# EAGLE board SparkFun u-blox GNSS MAX-M10S-Panel (EAGLE 9.6.2), part 1 of 4
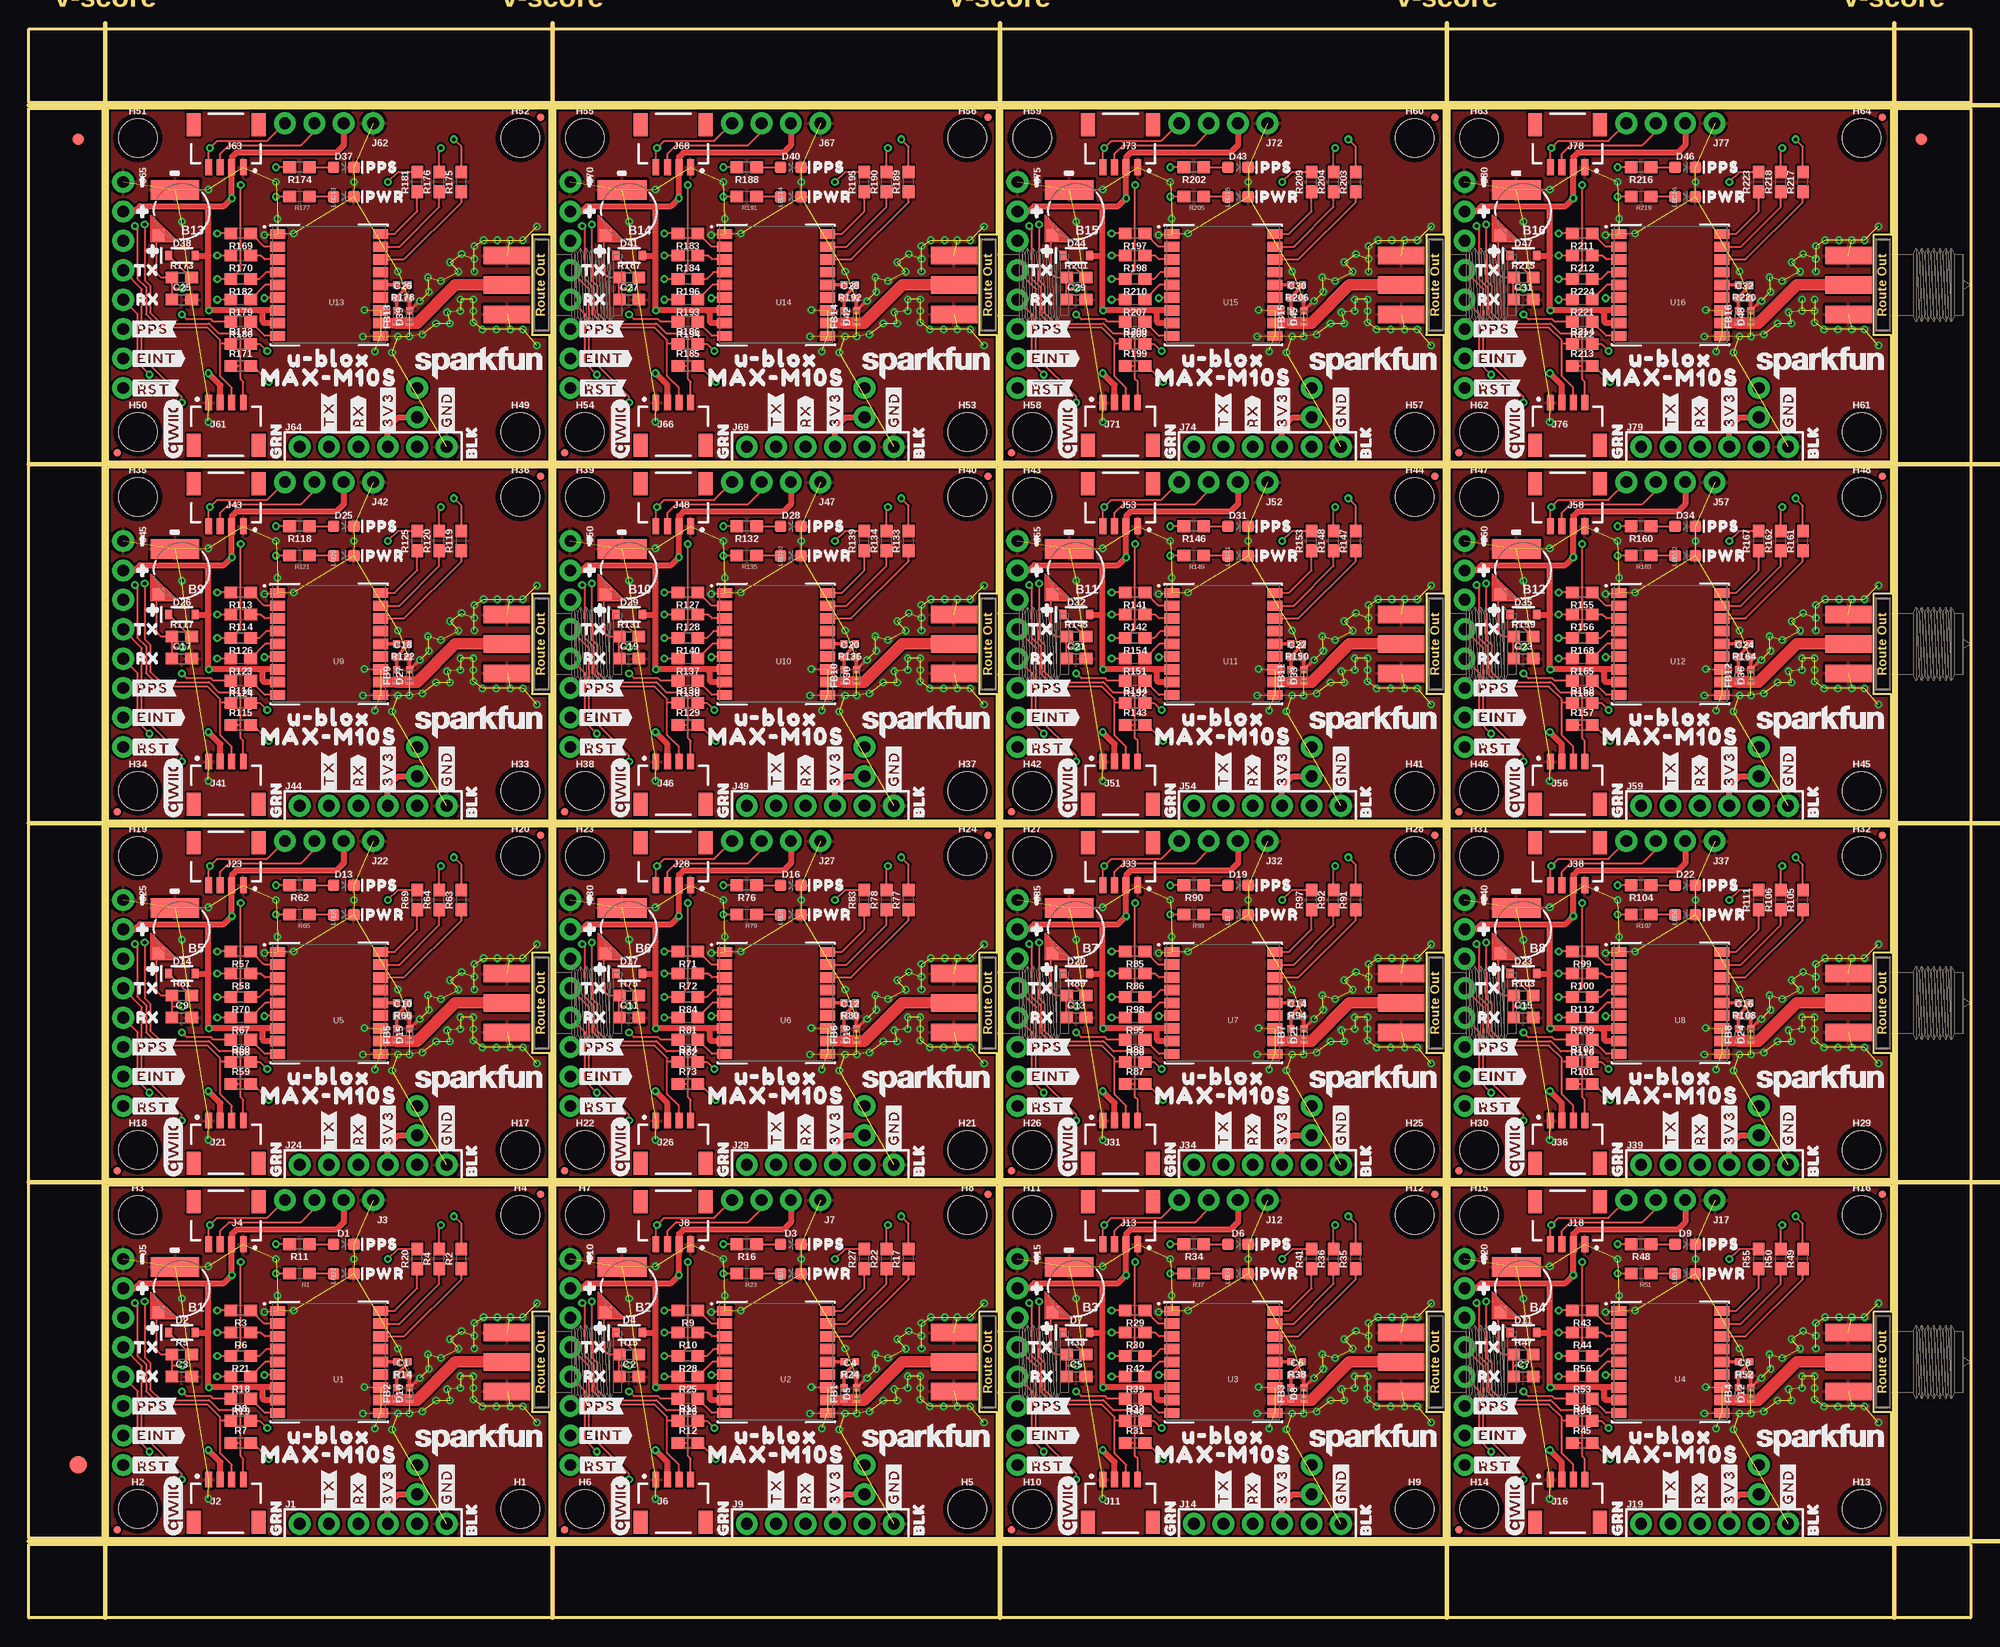
[diagram p0: board, top side]
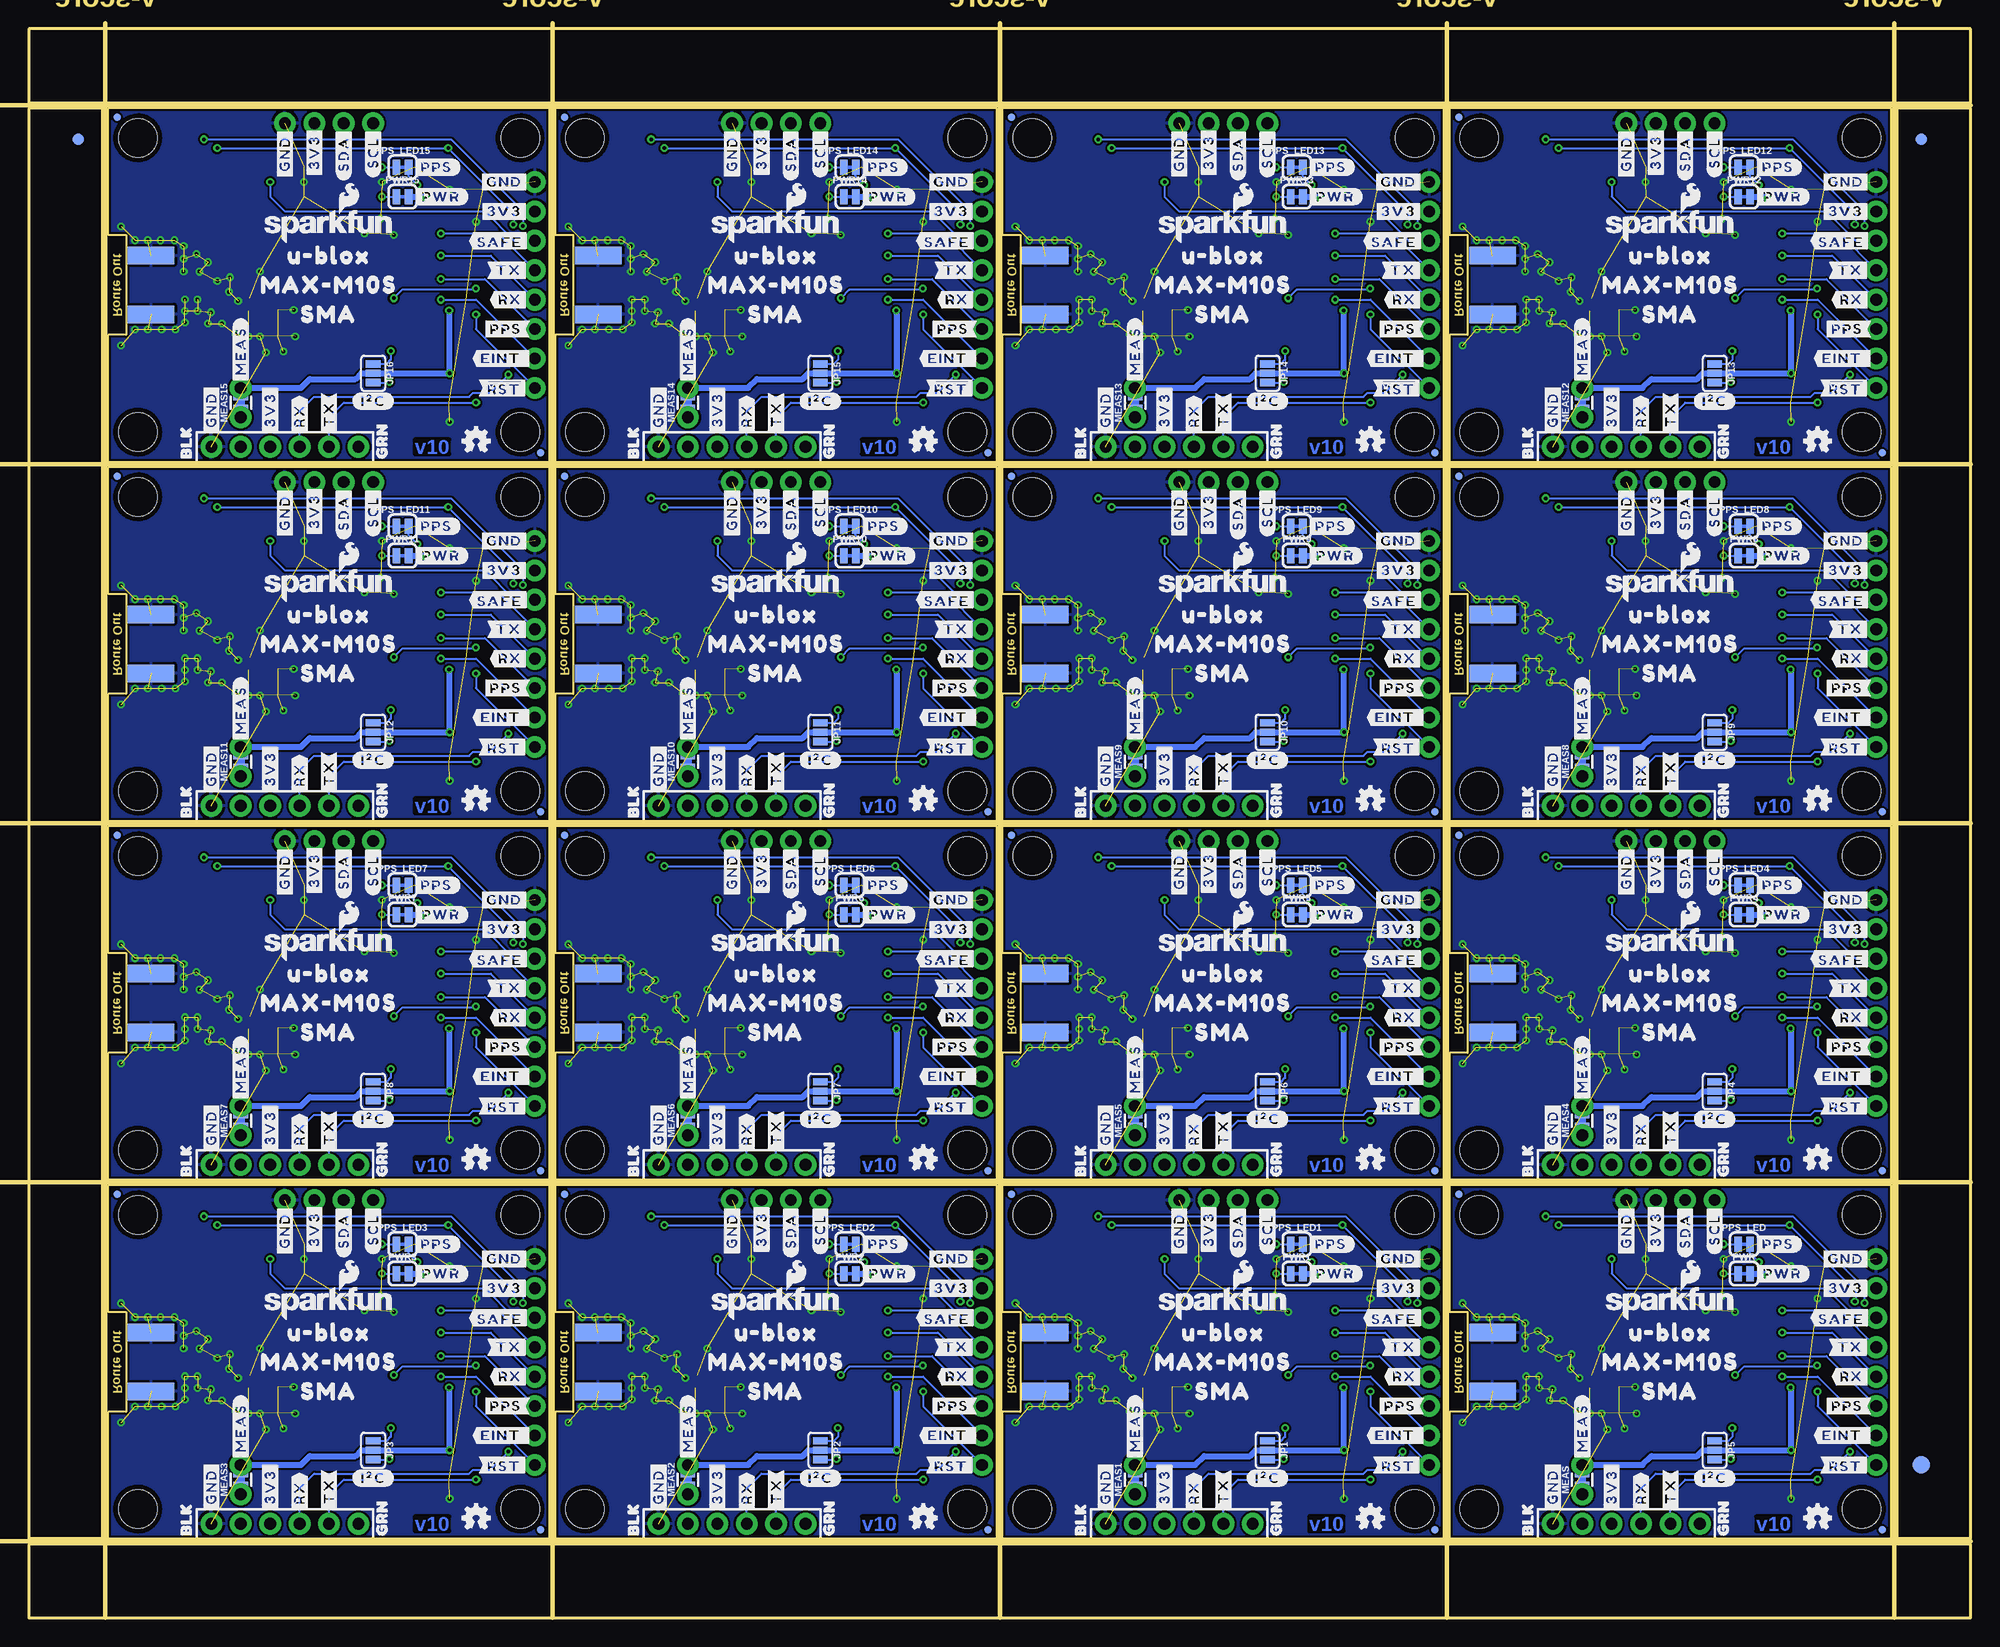
[diagram p1: board, bottom side, seen from below]

Size 167.64 x 137.16 mm. Coordinates in mm from the lower left corner, seen from the top.
Outline: 44.96,6.86 6.86,6.86 6.86,37.34 44.96,37.34 44.96,26.42 43.43,26.42 43.43,17.78 44.96,17.78 44.96,6.86
Outline: 83.57,6.86 45.47,6.86 45.47,37.34 83.57,37.34 83.57,26.42 82.04,26.42 82.04,17.78 83.57,17.78 83.57,6.86
Outline: 122.17,6.86 84.07,6.86 84.07,37.34 122.17,37.34 122.17,26.42 120.65,26.42 120.65,17.78 122.17,17.78 122.17,6.86
Outline: 160.78,6.86 122.68,6.86 122.68,37.34 160.78,37.34 160.78,26.42 159.26,26.42 159.26,17.78 160.78,17.78 160.78,6.86
Outline: 44.96,37.85 6.86,37.85 6.86,68.33 44.96,68.33 44.96,57.4 43.43,57.4 43.43,48.77 44.96,48.77 44.96,37.85
Outline: 83.57,37.85 45.47,37.85 45.47,68.33 83.57,68.33 83.57,57.4 82.04,57.4 82.04,48.77 83.57,48.77 83.57,37.85
Outline: 122.17,37.85 84.07,37.85 84.07,68.33 122.17,68.33 122.17,57.4 120.65,57.4 120.65,48.77 122.17,48.77 122.17,37.85
Outline: 160.78,37.85 122.68,37.85 122.68,68.33 160.78,68.33 160.78,57.4 159.26,57.4 159.26,48.77 160.78,48.77 160.78,37.85
Outline: 44.96,68.83 6.86,68.83 6.86,99.31 44.96,99.31 44.96,88.39 43.43,88.39 43.43,79.76 44.96,79.76 44.96,68.83
Outline: 83.57,68.83 45.47,68.83 45.47,99.31 83.57,99.31 83.57,88.39 82.04,88.39 82.04,79.76 83.57,79.76 83.57,68.83
Outline: 122.17,68.83 84.07,68.83 84.07,99.31 122.17,99.31 122.17,88.39 120.65,88.39 120.65,79.76 122.17,79.76 122.17,68.83
Outline: 160.78,68.83 122.68,68.83 122.68,99.31 160.78,99.31 160.78,88.39 159.26,88.39 159.26,79.76 160.78,79.76 160.78,68.83
Outline: 44.96,99.82 6.86,99.82 6.86,130.3 44.96,130.3 44.96,119.38 43.43,119.38 43.43,110.74 44.96,110.74 44.96,99.82
Outline: 83.57,99.82 45.47,99.82 45.47,130.3 83.57,130.3 83.57,119.38 82.04,119.38 82.04,110.74 83.57,110.74 83.57,99.82
Outline: 122.17,99.82 84.07,99.82 84.07,130.3 122.17,130.3 122.17,119.38 120.65,119.38 120.65,110.74 122.17,110.74 122.17,99.82
Outline: 160.78,99.82 122.68,99.82 122.68,130.3 160.78,130.3 160.78,119.38 159.26,119.38 159.26,110.74 160.78,110.74 160.78,99.82
Outline: 0,6.35 167.64,6.35 167.64,0 0,0 0,6.35
Outline: 161.29,130.3 167.64,130.3 167.64,6.86 161.29,6.86 161.29,130.3
Outline: 0,137.16 167.64,137.16 167.64,130.81 0,130.81 0,137.16
Outline: 0,130.3 6.35,130.3 6.35,6.86 0,6.86 0,130.3
Copper layers (1*16): Top 0.035mm / dielectric 1.5mm / Bottom 0.035mm
Design rules "SparkFun u-blox GNSS MAX-M10S": minimum track width 7mil, minimum drill 0.3mm, track to track 7mil, track to pad 7mil, pad to pad 7mil, via to via 7mil, smd to smd 7mil, copper to edge 7mil, drill to drill 7mil, minimum pad ring 7mil, minimum via ring 7mil, stop-mask expansion 4mil, vias tented up to drill 25mil, thermal gap 10mil
Net classes: 2 3.3V: width 0.508 mm, drill 0.305 mm; 3 RF: width 0.889 mm, drill 0.305 mm, clearance 0.203 mm
tKeepout: area 22.2,17 to 29.6,27.2; area 60.8,17 to 68.2,27.2; area 99.4,17 to 106.8,27.2; area 138,17 to 145.4,27.2; area 22.2,48 to 29.6,58.2; area 60.8,48 to 68.2,58.2; area 99.4,48 to 106.8,58.2; area 138,48 to 145.4,58.2; area 22.2,79 to 29.6,89.2; area 60.8,79 to 68.2,89.2; area 99.4,79 to 106.8,89.2; area 138,79 to 145.4,89.2; area 22.2,110 to 29.6,120.1; area 60.8,110 to 68.2,120.1; area 99.4,110 to 106.8,120.1; area 138,110 to 145.4,120.1
bKeepout: area 22.2,17 to 29.6,27.2; area 60.8,17 to 68.2,27.2; area 99.4,17 to 106.8,27.2; area 138,17 to 145.4,27.2; area 22.2,48 to 29.6,58.2; area 60.8,48 to 68.2,58.2; area 99.4,48 to 106.8,58.2; area 138,48 to 145.4,58.2; area 22.2,79 to 29.6,89.2; area 60.8,79 to 68.2,89.2; area 99.4,79 to 106.8,89.2; area 138,79 to 145.4,89.2; area 22.2,110 to 29.6,120.1; area 60.8,110 to 68.2,120.1; area 99.4,110 to 106.8,120.1; area 138,110 to 145.4,120.1
Milling: 10 lines

## Footprints (pad centres in the part's own frame; a part is rotated, then mirrored left to right if it is on the bottom)
ML414H_IV01E = smd 1 x 1: + 2.022,2.032 | smd 4.2 x 1.7: - 0.6,-1.85
0402-TIGHT = smd 0.6 x 0.6: 1 -0.5,0; 2 0.5,0
0603 = smd 1.1 x 1: 1 -0.85,0; 2 0.85,0
LED-0603 = smd 1 x 1: A -0.877,0; C 0.877,0
SOD-323 = smd 0.63 x 0.83: A 1.15,0; C -1.15,0
SMA-EDGE = smd 1.5 x 4: GND@0 -2.54,0; GND@1 2.54,0; SIG 0,0 | smd 1.5 x 4 bottom: GND@2 -2.54,0; GND@3 2.54,0
FIDUCIAL-1X2 = smd 1 x 1: 1 0,0
FIDUCIAL-1.5X3 = smd 1.5 x 1.5: 1 0,0
FIDUCIAL-MICRO = smd 0.635 x 0.635: 1 0,0
STAND-OFF = hole 3.302: 0,0
1X06_NO_SILK = drill 1.016 pad 1.88: 1 0,0; 2 2.54,0; 3 5.08,0; 4 7.62,0; 5 10.16,0; 6 12.7,0
JST04_1MM_RA = smd 0.6 x 1.35: 1 -1.5,0; 2 -0.5,0; 3 0.5,0; 4 1.5,0 | smd 1.2 x 2: NC1 2.8,-3.675; NC2 -2.8,-3.675
1X04_NO_SILK = drill 1.016 pad 1.88: 1 0,0; 2 2.54,0; 3 5.08,0; 4 7.62,0
1X08_NO_SILK = drill 1.016 pad 1.88: 1 0,0; 2 2.54,0; 3 5.08,0; 4 7.62,0; 5 10.16,0; 6 12.7,0; 7 15.24,0; 8 17.78,0
SMT-JUMPER_3_NO_SILK = smd 0.635 x 1.27: 1 -0.813,0; 2 0,0; 3 0.813,0
COMBO-JUMPER_2_NC_TRACE = smd 0.635 x 1.27: 1 -0.508,0; 2 0.508,0 | drill 1.016 pad 1.88: 3 -1.27,0; 4 1.27,0
SMT-JUMPER_2_NC_TRACE_SILK = smd 0.66 x 1.27: 1 -0.521,0; 2 0.521,0
MAX-M10S = smd 1.3 x 0.8: 1 4.45,-4.4; 9 4.45,4.4; 10 -4.45,4.4; 18 -4.45,-4.4 | smd 1.3 x 0.9: 2 4.45,-3.3; 3 4.45,-2.2; 4 4.45,-1.1; 5 4.45,0; 6 4.45,1.1; 7 4.45,2.2; 8 4.45,3.3; 11 -4.45,3.3; 12 -4.45,2.2; 13 -4.45,1.1; 14 -4.45,0; 15 -4.45,-1.1; 16 -4.45,-2.2; 17 -4.45,-3.3

## Placement (x,y rotation side)
B1  6.8MM_COIN_CELL  [ML414H_IV01E]  13.21,28.45 180 top
B2  6.8MM_COIN_CELL  [ML414H_IV01E]  51.82,28.45 180 top
B3  6.8MM_COIN_CELL  [ML414H_IV01E]  90.42,28.45 180 top
B4  6.8MM_COIN_CELL  [ML414H_IV01E]  129.03,28.45 180 top
B5  6.8MM_COIN_CELL  [ML414H_IV01E]  13.21,59.44 180 top
B6  6.8MM_COIN_CELL  [ML414H_IV01E]  51.82,59.44 180 top
B7  6.8MM_COIN_CELL  [ML414H_IV01E]  90.42,59.44 180 top
B8  6.8MM_COIN_CELL  [ML414H_IV01E]  129.03,59.44 180 top
B9  6.8MM_COIN_CELL  [ML414H_IV01E]  13.21,90.42 180 top
B10  6.8MM_COIN_CELL  [ML414H_IV01E]  51.82,90.42 180 top
B11  6.8MM_COIN_CELL  [ML414H_IV01E]  90.42,90.42 180 top
B12  6.8MM_COIN_CELL  [ML414H_IV01E]  129.03,90.42 180 top
B13  6.8MM_COIN_CELL  [ML414H_IV01E]  13.21,121.41 180 top
B14  6.8MM_COIN_CELL  [ML414H_IV01E]  51.82,121.41 180 top
B15  6.8MM_COIN_CELL  [ML414H_IV01E]  90.42,121.41 180 top
B16  6.8MM_COIN_CELL  [ML414H_IV01E]  129.03,121.41 180 top
C1  47pF  [0402-TIGHT]  32.26,20.95 0 top
C2  1.0uF  [0603]  51.82,20.83 0 top
C3  1.0uF  [0603]  13.21,20.83 0 top
C4  47pF  [0402-TIGHT]  70.87,20.95 0 top
C5  1.0uF  [0603]  90.42,20.83 0 top
C6  47pF  [0402-TIGHT]  109.47,20.95 0 top
C7  1.0uF  [0603]  129.03,20.83 0 top
C8  47pF  [0402-TIGHT]  148.08,20.95 0 top
C9  1.0uF  [0603]  13.21,51.82 0 top
C10  47pF  [0402-TIGHT]  32.26,51.94 0 top
C11  1.0uF  [0603]  51.82,51.82 0 top
C12  47pF  [0402-TIGHT]  70.87,51.94 0 top
C13  1.0uF  [0603]  90.42,51.82 0 top
C14  47pF  [0402-TIGHT]  109.47,51.94 0 top
C15  1.0uF  [0603]  129.03,51.82 0 top
C16  47pF  [0402-TIGHT]  148.08,51.94 0 top
C17  1.0uF  [0603]  13.21,82.8 0 top
C18  47pF  [0402-TIGHT]  32.26,82.93 0 top
C19  1.0uF  [0603]  51.82,82.8 0 top
C20  47pF  [0402-TIGHT]  70.87,82.93 0 top
C21  1.0uF  [0603]  90.42,82.8 0 top
C22  47pF  [0402-TIGHT]  109.47,82.93 0 top
C23  1.0uF  [0603]  129.03,82.8 0 top
C24  47pF  [0402-TIGHT]  148.08,82.93 0 top
C25  1.0uF  [0603]  13.21,113.79 0 top
C26  47pF  [0402-TIGHT]  32.26,113.92 0 top
C27  1.0uF  [0603]  51.82,113.79 0 top
C28  47pF  [0402-TIGHT]  70.87,113.92 0 top
C29  1.0uF  [0603]  90.42,113.79 0 top
C30  47pF  [0402-TIGHT]  109.47,113.92 0 top
C31  1.0uF  [0603]  129.03,113.79 0 top
C32  47pF  [0402-TIGHT]  148.08,113.92 0 top
D1  Yellow  [LED-0603]  27.18,32.26 0 top
D2  0.5A/40V/420mV  [SOD-323]  13.21,24.64 0 top
D3  Yellow  [LED-0603]  65.79,32.26 0 top
D4  0.5A/40V/420mV  [SOD-323]  51.82,24.64 0 top
D5  PESD0402-0402T  [0402-TIGHT]  71.47,19.36 90 top
D6  Yellow  [LED-0603]  104.39,32.26 0 top
D7  0.5A/40V/420mV  [SOD-323]  90.42,24.64 0 top
D8  PESD0402-0402T  [0402-TIGHT]  110.07,19.36 90 top
D9  Yellow  [LED-0603]  143,32.26 0 top
D10  PESD0402-0402T  [0402-TIGHT]  32.86,19.36 90 top
D11  0.5A/40V/420mV  [SOD-323]  129.03,24.64 0 top
D12  PESD0402-0402T  [0402-TIGHT]  148.68,19.36 90 top
D13  Yellow  [LED-0603]  27.18,63.25 0 top
D14  0.5A/40V/420mV  [SOD-323]  13.21,55.63 0 top
D15  PESD0402-0402T  [0402-TIGHT]  32.86,50.35 90 top
D16  Yellow  [LED-0603]  65.79,63.25 0 top
D17  0.5A/40V/420mV  [SOD-323]  51.82,55.63 0 top
D18  PESD0402-0402T  [0402-TIGHT]  71.47,50.35 90 top
D19  Yellow  [LED-0603]  104.39,63.25 0 top
D20  0.5A/40V/420mV  [SOD-323]  90.42,55.63 0 top
D21  PESD0402-0402T  [0402-TIGHT]  110.07,50.35 90 top
D22  Yellow  [LED-0603]  143,63.25 0 top
D23  0.5A/40V/420mV  [SOD-323]  129.03,55.63 0 top
D24  PESD0402-0402T  [0402-TIGHT]  148.68,50.35 90 top
D25  Yellow  [LED-0603]  27.18,94.23 0 top
D26  0.5A/40V/420mV  [SOD-323]  13.21,86.61 0 top
D27  PESD0402-0402T  [0402-TIGHT]  32.86,81.33 90 top
D28  Yellow  [LED-0603]  65.79,94.23 0 top
D29  0.5A/40V/420mV  [SOD-323]  51.82,86.61 0 top
D30  PESD0402-0402T  [0402-TIGHT]  71.47,81.33 90 top
D31  Yellow  [LED-0603]  104.39,94.23 0 top
D32  0.5A/40V/420mV  [SOD-323]  90.42,86.61 0 top
D33  PESD0402-0402T  [0402-TIGHT]  110.07,81.33 90 top
D34  Yellow  [LED-0603]  143,94.23 0 top
D35  0.5A/40V/420mV  [SOD-323]  129.03,86.61 0 top
D36  PESD0402-0402T  [0402-TIGHT]  148.68,81.33 90 top
D37  Yellow  [LED-0603]  27.18,125.22 0 top
D38  0.5A/40V/420mV  [SOD-323]  13.21,117.6 0 top
D39  PESD0402-0402T  [0402-TIGHT]  32.86,112.32 90 top
D40  Yellow  [LED-0603]  65.79,125.22 0 top
D41  0.5A/40V/420mV  [SOD-323]  51.82,117.6 0 top
D42  PESD0402-0402T  [0402-TIGHT]  71.47,112.32 90 top
D43  Yellow  [LED-0603]  104.39,125.22 0 top
D44  0.5A/40V/420mV  [SOD-323]  90.42,117.6 0 top
D45  PESD0402-0402T  [0402-TIGHT]  110.07,112.32 90 top
D46  Yellow  [LED-0603]  143,125.22 0 top
D47  0.5A/40V/420mV  [SOD-323]  129.03,117.6 0 top
D48  PESD0402-0402T  [0402-TIGHT]  148.68,112.32 90 top
E1  ANTENNA-SMA-GROUNDEDEDGE_SMA  [SMA-EDGE]  41.27,22.1 270 top
E2  ANTENNA-SMA-GROUNDEDEDGE_SMA  [SMA-EDGE]  79.88,22.1 270 top
E3  ANTENNA-SMA-GROUNDEDEDGE_SMA  [SMA-EDGE]  118.49,22.1 270 top
E4  ANTENNA-SMA-GROUNDEDEDGE_SMA  [SMA-EDGE]  157.1,22.1 270 top
E5  ANTENNA-SMA-GROUNDEDEDGE_SMA  [SMA-EDGE]  41.27,53.09 270 top
E6  ANTENNA-SMA-GROUNDEDEDGE_SMA  [SMA-EDGE]  79.88,53.09 270 top
E7  ANTENNA-SMA-GROUNDEDEDGE_SMA  [SMA-EDGE]  118.49,53.09 270 top
E8  ANTENNA-SMA-GROUNDEDEDGE_SMA  [SMA-EDGE]  157.1,53.09 270 top
E9  ANTENNA-SMA-GROUNDEDEDGE_SMA  [SMA-EDGE]  41.27,84.07 270 top
E10  ANTENNA-SMA-GROUNDEDEDGE_SMA  [SMA-EDGE]  79.88,84.07 270 top
E11  ANTENNA-SMA-GROUNDEDEDGE_SMA  [SMA-EDGE]  118.49,84.07 270 top
E12  ANTENNA-SMA-GROUNDEDEDGE_SMA  [SMA-EDGE]  157.1,84.07 270 top
E13  ANTENNA-SMA-GROUNDEDEDGE_SMA  [SMA-EDGE]  41.27,115.06 270 top
E14  ANTENNA-SMA-GROUNDEDEDGE_SMA  [SMA-EDGE]  79.88,115.06 270 top
E15  ANTENNA-SMA-GROUNDEDEDGE_SMA  [SMA-EDGE]  118.49,115.06 270 top
E16  ANTENNA-SMA-GROUNDEDEDGE_SMA  [SMA-EDGE]  157.1,115.06 270 top
E$1  [FIDUCIAL-1X2]  4.23,127.64 0 top
E$2  [FIDUCIAL-1X2]  4.23,127.64 0 bottom
E$3  [FIDUCIAL-1X2]  163.41,127.64 0 top
E$4  [FIDUCIAL-1X2]  163.41,127.64 0 bottom
E$5  [FIDUCIAL-1.5X3]  4.23,13.21 0 top
E$6  [FIDUCIAL-1.5X3]  4.23,13.21 0 bottom
FB1  2.66Ω  [0402-TIGHT]  70.37,19.36 90 top
FB2  2.66Ω  [0402-TIGHT]  31.76,19.36 90 top
FB3  2.66Ω  [0402-TIGHT]  108.97,19.36 90 top
FB4  2.66Ω  [0402-TIGHT]  147.58,19.36 90 top
FB5  2.66Ω  [0402-TIGHT]  31.76,50.35 90 top
FB6  2.66Ω  [0402-TIGHT]  70.37,50.35 90 top
FB7  2.66Ω  [0402-TIGHT]  108.97,50.35 90 top
FB8  2.66Ω  [0402-TIGHT]  147.58,50.35 90 top
FB9  2.66Ω  [0402-TIGHT]  31.76,81.33 90 top
FB10  2.66Ω  [0402-TIGHT]  70.37,81.33 90 top
FB11  2.66Ω  [0402-TIGHT]  108.97,81.33 90 top
FB12  2.66Ω  [0402-TIGHT]  147.58,81.33 90 top
FB13  2.66Ω  [0402-TIGHT]  31.76,112.32 90 top
FB14  2.66Ω  [0402-TIGHT]  70.37,112.32 90 top
FB15  2.66Ω  [0402-TIGHT]  108.97,112.32 90 top
FB16  2.66Ω  [0402-TIGHT]  147.58,112.32 90 top
FD1  FIDUCIALUFIDUCIAL  [FIDUCIAL-MICRO]  7.62,7.62 0 top
FD2  FIDUCIALUFIDUCIAL  [FIDUCIAL-MICRO]  7.62,7.62 0 bottom
FD3  FIDUCIALUFIDUCIAL  [FIDUCIAL-MICRO]  44.2,36.58 0 top
FD4  FIDUCIALUFIDUCIAL  [FIDUCIAL-MICRO]  44.2,36.58 0 bottom
FD5  FIDUCIALUFIDUCIAL  [FIDUCIAL-MICRO]  46.23,7.62 0 top
FD6  FIDUCIALUFIDUCIAL  [FIDUCIAL-MICRO]  46.23,7.62 0 bottom
FD7  FIDUCIALUFIDUCIAL  [FIDUCIAL-MICRO]  82.8,36.58 0 top
FD8  FIDUCIALUFIDUCIAL  [FIDUCIAL-MICRO]  82.8,36.58 0 bottom
FD9  FIDUCIALUFIDUCIAL  [FIDUCIAL-MICRO]  84.84,7.62 0 top
FD10  FIDUCIALUFIDUCIAL  [FIDUCIAL-MICRO]  84.84,7.62 0 bottom
FD11  FIDUCIALUFIDUCIAL  [FIDUCIAL-MICRO]  121.41,36.58 0 top
FD12  FIDUCIALUFIDUCIAL  [FIDUCIAL-MICRO]  121.41,36.58 0 bottom
FD13  FIDUCIALUFIDUCIAL  [FIDUCIAL-MICRO]  123.44,7.62 0 top
FD14  FIDUCIALUFIDUCIAL  [FIDUCIAL-MICRO]  123.44,7.62 0 bottom
FD15  FIDUCIALUFIDUCIAL  [FIDUCIAL-MICRO]  160.02,36.58 0 top
FD16  FIDUCIALUFIDUCIAL  [FIDUCIAL-MICRO]  160.02,36.58 0 bottom
FD17  FIDUCIALUFIDUCIAL  [FIDUCIAL-MICRO]  7.62,38.61 0 top
FD18  FIDUCIALUFIDUCIAL  [FIDUCIAL-MICRO]  7.62,38.61 0 bottom
FD19  FIDUCIALUFIDUCIAL  [FIDUCIAL-MICRO]  44.2,67.56 0 top
FD20  FIDUCIALUFIDUCIAL  [FIDUCIAL-MICRO]  44.2,67.56 0 bottom
FD21  FIDUCIALUFIDUCIAL  [FIDUCIAL-MICRO]  46.23,38.61 0 top
FD22  FIDUCIALUFIDUCIAL  [FIDUCIAL-MICRO]  46.23,38.61 0 bottom
FD23  FIDUCIALUFIDUCIAL  [FIDUCIAL-MICRO]  82.8,67.56 0 top
FD24  FIDUCIALUFIDUCIAL  [FIDUCIAL-MICRO]  82.8,67.56 0 bottom
FD25  FIDUCIALUFIDUCIAL  [FIDUCIAL-MICRO]  84.84,38.61 0 top
FD26  FIDUCIALUFIDUCIAL  [FIDUCIAL-MICRO]  84.84,38.61 0 bottom
FD27  FIDUCIALUFIDUCIAL  [FIDUCIAL-MICRO]  121.41,67.56 0 top
FD28  FIDUCIALUFIDUCIAL  [FIDUCIAL-MICRO]  121.41,67.56 0 bottom
FD29  FIDUCIALUFIDUCIAL  [FIDUCIAL-MICRO]  123.44,38.61 0 top
FD30  FIDUCIALUFIDUCIAL  [FIDUCIAL-MICRO]  123.44,38.61 0 bottom
FD31  FIDUCIALUFIDUCIAL  [FIDUCIAL-MICRO]  160.02,67.56 0 top
FD32  FIDUCIALUFIDUCIAL  [FIDUCIAL-MICRO]  160.02,67.56 0 bottom
FD33  FIDUCIALUFIDUCIAL  [FIDUCIAL-MICRO]  7.62,69.6 0 top
FD34  FIDUCIALUFIDUCIAL  [FIDUCIAL-MICRO]  7.62,69.6 0 bottom
FD35  FIDUCIALUFIDUCIAL  [FIDUCIAL-MICRO]  44.2,98.55 0 top
FD36  FIDUCIALUFIDUCIAL  [FIDUCIAL-MICRO]  44.2,98.55 0 bottom
FD37  FIDUCIALUFIDUCIAL  [FIDUCIAL-MICRO]  46.23,69.6 0 top
FD38  FIDUCIALUFIDUCIAL  [FIDUCIAL-MICRO]  46.23,69.6 0 bottom
FD39  FIDUCIALUFIDUCIAL  [FIDUCIAL-MICRO]  82.8,98.55 0 top
FD40  FIDUCIALUFIDUCIAL  [FIDUCIAL-MICRO]  82.8,98.55 0 bottom
FD41  FIDUCIALUFIDUCIAL  [FIDUCIAL-MICRO]  84.84,69.6 0 top
FD42  FIDUCIALUFIDUCIAL  [FIDUCIAL-MICRO]  84.84,69.6 0 bottom
FD43  FIDUCIALUFIDUCIAL  [FIDUCIAL-MICRO]  121.41,98.55 0 top
FD44  FIDUCIALUFIDUCIAL  [FIDUCIAL-MICRO]  121.41,98.55 0 bottom
FD45  FIDUCIALUFIDUCIAL  [FIDUCIAL-MICRO]  123.44,69.6 0 top
FD46  FIDUCIALUFIDUCIAL  [FIDUCIAL-MICRO]  123.44,69.6 0 bottom
FD47  FIDUCIALUFIDUCIAL  [FIDUCIAL-MICRO]  160.02,98.55 0 top
FD48  FIDUCIALUFIDUCIAL  [FIDUCIAL-MICRO]  160.02,98.55 0 bottom
FD49  FIDUCIALUFIDUCIAL  [FIDUCIAL-MICRO]  7.62,100.58 0 top
FD50  FIDUCIALUFIDUCIAL  [FIDUCIAL-MICRO]  7.62,100.58 0 bottom
FD51  FIDUCIALUFIDUCIAL  [FIDUCIAL-MICRO]  44.2,129.54 0 top
FD52  FIDUCIALUFIDUCIAL  [FIDUCIAL-MICRO]  44.2,129.54 0 bottom
FD53  FIDUCIALUFIDUCIAL  [FIDUCIAL-MICRO]  46.23,100.58 0 top
FD54  FIDUCIALUFIDUCIAL  [FIDUCIAL-MICRO]  46.23,100.58 0 bottom
FD55  FIDUCIALUFIDUCIAL  [FIDUCIAL-MICRO]  82.8,129.54 0 top
FD56  FIDUCIALUFIDUCIAL  [FIDUCIAL-MICRO]  82.8,129.54 0 bottom
FD57  FIDUCIALUFIDUCIAL  [FIDUCIAL-MICRO]  84.84,100.58 0 top
FD58  FIDUCIALUFIDUCIAL  [FIDUCIAL-MICRO]  84.84,100.58 0 bottom
FD59  FIDUCIALUFIDUCIAL  [FIDUCIAL-MICRO]  121.41,129.54 0 top
FD60  FIDUCIALUFIDUCIAL  [FIDUCIAL-MICRO]  121.41,129.54 0 bottom
FD61  FIDUCIALUFIDUCIAL  [FIDUCIAL-MICRO]  123.44,100.58 0 top
FD62  FIDUCIALUFIDUCIAL  [FIDUCIAL-MICRO]  123.44,100.58 0 bottom
FD63  FIDUCIALUFIDUCIAL  [FIDUCIAL-MICRO]  160.02,129.54 0 top
FD64  FIDUCIALUFIDUCIAL  [FIDUCIAL-MICRO]  160.02,129.54 0 bottom
H1  STAND-OFF  [STAND-OFF]  42.42,9.4 0 top
H2  STAND-OFF  [STAND-OFF]  9.4,9.4 0 top
H3  STAND-OFF  [STAND-OFF]  9.4,34.8 0 top
H4  STAND-OFF  [STAND-OFF]  42.42,34.8 0 top
H5  STAND-OFF  [STAND-OFF]  81.03,9.4 0 top
H6  STAND-OFF  [STAND-OFF]  48.01,9.4 0 top
H7  STAND-OFF  [STAND-OFF]  48.01,34.8 0 top
H8  STAND-OFF  [STAND-OFF]  81.03,34.8 0 top
H9  STAND-OFF  [STAND-OFF]  119.63,9.4 0 top
H10  STAND-OFF  [STAND-OFF]  86.61,9.4 0 top
H11  STAND-OFF  [STAND-OFF]  86.61,34.8 0 top
H12  STAND-OFF  [STAND-OFF]  119.63,34.8 0 top
H13  STAND-OFF  [STAND-OFF]  158.24,9.4 0 top
H14  STAND-OFF  [STAND-OFF]  125.22,9.4 0 top
H15  STAND-OFF  [STAND-OFF]  125.22,34.8 0 top
H16  STAND-OFF  [STAND-OFF]  158.24,34.8 0 top
H17  STAND-OFF  [STAND-OFF]  42.42,40.39 0 top
H18  STAND-OFF  [STAND-OFF]  9.4,40.39 0 top
H19  STAND-OFF  [STAND-OFF]  9.4,65.79 0 top
H20  STAND-OFF  [STAND-OFF]  42.42,65.79 0 top
H21  STAND-OFF  [STAND-OFF]  81.03,40.39 0 top
H22  STAND-OFF  [STAND-OFF]  48.01,40.39 0 top
H23  STAND-OFF  [STAND-OFF]  48.01,65.79 0 top
H24  STAND-OFF  [STAND-OFF]  81.03,65.79 0 top
H25  STAND-OFF  [STAND-OFF]  119.63,40.39 0 top
H26  STAND-OFF  [STAND-OFF]  86.61,40.39 0 top
H27  STAND-OFF  [STAND-OFF]  86.61,65.79 0 top
H28  STAND-OFF  [STAND-OFF]  119.63,65.79 0 top
H29  STAND-OFF  [STAND-OFF]  158.24,40.39 0 top
H30  STAND-OFF  [STAND-OFF]  125.22,40.39 0 top
H31  STAND-OFF  [STAND-OFF]  125.22,65.79 0 top
H32  STAND-OFF  [STAND-OFF]  158.24,65.79 0 top
H33  STAND-OFF  [STAND-OFF]  42.42,71.37 0 top
H34  STAND-OFF  [STAND-OFF]  9.4,71.37 0 top
H35  STAND-OFF  [STAND-OFF]  9.4,96.77 0 top
H36  STAND-OFF  [STAND-OFF]  42.42,96.77 0 top
H37  STAND-OFF  [STAND-OFF]  81.03,71.37 0 top
H38  STAND-OFF  [STAND-OFF]  48.01,71.37 0 top
H39  STAND-OFF  [STAND-OFF]  48.01,96.77 0 top
H40  STAND-OFF  [STAND-OFF]  81.03,96.77 0 top
H41  STAND-OFF  [STAND-OFF]  119.63,71.37 0 top
H42  STAND-OFF  [STAND-OFF]  86.61,71.37 0 top
H43  STAND-OFF  [STAND-OFF]  86.61,96.77 0 top
H44  STAND-OFF  [STAND-OFF]  119.63,96.77 0 top
H45  STAND-OFF  [STAND-OFF]  158.24,71.37 0 top
H46  STAND-OFF  [STAND-OFF]  125.22,71.37 0 top
H47  STAND-OFF  [STAND-OFF]  125.22,96.77 0 top
H48  STAND-OFF  [STAND-OFF]  158.24,96.77 0 top
H49  STAND-OFF  [STAND-OFF]  42.42,102.36 0 top
H50  STAND-OFF  [STAND-OFF]  9.4,102.36 0 top
H51  STAND-OFF  [STAND-OFF]  9.4,127.76 0 top
H52  STAND-OFF  [STAND-OFF]  42.42,127.76 0 top
H53  STAND-OFF  [STAND-OFF]  81.03,102.36 0 top
H54  STAND-OFF  [STAND-OFF]  48.01,102.36 0 top
H55  STAND-OFF  [STAND-OFF]  48.01,127.76 0 top
H56  STAND-OFF  [STAND-OFF]  81.03,127.76 0 top
H57  STAND-OFF  [STAND-OFF]  119.63,102.36 0 top
H58  STAND-OFF  [STAND-OFF]  86.61,102.36 0 top
H59  STAND-OFF  [STAND-OFF]  86.61,127.76 0 top
H60  STAND-OFF  [STAND-OFF]  119.63,127.76 0 top
H61  STAND-OFF  [STAND-OFF]  158.24,102.36 0 top
H62  STAND-OFF  [STAND-OFF]  125.22,102.36 0 top
H63  STAND-OFF  [STAND-OFF]  125.22,127.76 0 top
H64  STAND-OFF  [STAND-OFF]  158.24,127.76 0 top
J1  USB-to-Serial  [1X06_NO_SILK]  23.37,8.13 0 top
J2  Qwiic RA  [JST04_1MM_RA]  17.02,11.94 0 top
J3  PTH  [1X04_NO_SILK]  29.72,36.07 180 top
J4  Qwiic RA  [JST04_1MM_RA]  17.02,32.26 180 top
J5  [1X08_NO_SILK]  8.13,30.99 270 top
J6  Qwiic RA  [JST04_1MM_RA]  55.63,11.94 0 top
J7  PTH  [1X04_NO_SILK]  68.33,36.07 180 top
J8  Qwiic RA  [JST04_1MM_RA]  55.63,32.26 180 top
J9  USB-to-Serial  [1X06_NO_SILK]  61.98,8.13 0 top
J10  [1X08_NO_SILK]  46.74,30.99 270 top
J11  Qwiic RA  [JST04_1MM_RA]  94.23,11.94 0 top
J12  PTH  [1X04_NO_SILK]  106.93,36.07 180 top
J13  Qwiic RA  [JST04_1MM_RA]  94.23,32.26 180 top
J14  USB-to-Serial  [1X06_NO_SILK]  100.58,8.13 0 top
J15  [1X08_NO_SILK]  85.34,30.99 270 top
J16  Qwiic RA  [JST04_1MM_RA]  132.84,11.94 0 top
J17  PTH  [1X04_NO_SILK]  145.54,36.07 180 top
J18  Qwiic RA  [JST04_1MM_RA]  132.84,32.26 180 top
J19  USB-to-Serial  [1X06_NO_SILK]  139.19,8.13 0 top
J20  [1X08_NO_SILK]  123.95,30.99 270 top
J21  Qwiic RA  [JST04_1MM_RA]  17.02,42.93 0 top
J22  PTH  [1X04_NO_SILK]  29.72,67.06 180 top
J23  Qwiic RA  [JST04_1MM_RA]  17.02,63.25 180 top
J24  USB-to-Serial  [1X06_NO_SILK]  23.37,39.12 0 top
J25  [1X08_NO_SILK]  8.13,61.98 270 top
J26  Qwiic RA  [JST04_1MM_RA]  55.63,42.93 0 top
J27  PTH  [1X04_NO_SILK]  68.33,67.06 180 top
J28  Qwiic RA  [JST04_1MM_RA]  55.63,63.25 180 top
J29  USB-to-Serial  [1X06_NO_SILK]  61.98,39.12 0 top
J30  [1X08_NO_SILK]  46.74,61.98 270 top
J31  Qwiic RA  [JST04_1MM_RA]  94.23,42.93 0 top
J32  PTH  [1X04_NO_SILK]  106.93,67.06 180 top
J33  Qwiic RA  [JST04_1MM_RA]  94.23,63.25 180 top
J34  USB-to-Serial  [1X06_NO_SILK]  100.58,39.12 0 top
J35  [1X08_NO_SILK]  85.34,61.98 270 top
J36  Qwiic RA  [JST04_1MM_RA]  132.84,42.93 0 top
J37  PTH  [1X04_NO_SILK]  145.54,67.06 180 top
J38  Qwiic RA  [JST04_1MM_RA]  132.84,63.25 180 top
J39  USB-to-Serial  [1X06_NO_SILK]  139.19,39.12 0 top
J40  [1X08_NO_SILK]  123.95,61.98 270 top
J41  Qwiic RA  [JST04_1MM_RA]  17.02,73.91 0 top
J42  PTH  [1X04_NO_SILK]  29.72,98.04 180 top
J43  Qwiic RA  [JST04_1MM_RA]  17.02,94.23 180 top
J44  USB-to-Serial  [1X06_NO_SILK]  23.37,70.1 0 top
J45  [1X08_NO_SILK]  8.13,92.96 270 top
J46  Qwiic RA  [JST04_1MM_RA]  55.63,73.91 0 top
J47  PTH  [1X04_NO_SILK]  68.33,98.04 180 top
J48  Qwiic RA  [JST04_1MM_RA]  55.63,94.23 180 top
J49  USB-to-Serial  [1X06_NO_SILK]  61.98,70.1 0 top
J50  [1X08_NO_SILK]  46.74,92.96 270 top
J51  Qwiic RA  [JST04_1MM_RA]  94.23,73.91 0 top
J52  PTH  [1X04_NO_SILK]  106.93,98.04 180 top
J53  Qwiic RA  [JST04_1MM_RA]  94.23,94.23 180 top
J54  USB-to-Serial  [1X06_NO_SILK]  100.58,70.1 0 top
J55  [1X08_NO_SILK]  85.34,92.96 270 top
J56  Qwiic RA  [JST04_1MM_RA]  132.84,73.91 0 top
J57  PTH  [1X04_NO_SILK]  145.54,98.04 180 top
J58  Qwiic RA  [JST04_1MM_RA]  132.84,94.23 180 top
J59  USB-to-Serial  [1X06_NO_SILK]  139.19,70.1 0 top
J60  [1X08_NO_SILK]  123.95,92.96 270 top
J61  Qwiic RA  [JST04_1MM_RA]  17.02,104.9 0 top
J62  PTH  [1X04_NO_SILK]  29.72,129.03 180 top
J63  Qwiic RA  [JST04_1MM_RA]  17.02,125.22 180 top
J64  USB-to-Serial  [1X06_NO_SILK]  23.37,101.09 0 top
J65  [1X08_NO_SILK]  8.13,123.95 270 top
J66  Qwiic RA  [JST04_1MM_RA]  55.63,104.9 0 top
J67  PTH  [1X04_NO_SILK]  68.33,129.03 180 top
J68  Qwiic RA  [JST04_1MM_RA]  55.63,125.22 180 top
J69  USB-to-Serial  [1X06_NO_SILK]  61.98,101.09 0 top
J70  [1X08_NO_SILK]  46.74,123.95 270 top
J71  Qwiic RA  [JST04_1MM_RA]  94.23,104.9 0 top
J72  PTH  [1X04_NO_SILK]  106.93,129.03 180 top
J73  Qwiic RA  [JST04_1MM_RA]  94.23,125.22 180 top
J74  USB-to-Serial  [1X06_NO_SILK]  100.58,101.09 0 top
J75  [1X08_NO_SILK]  85.34,123.95 270 top
J76  Qwiic RA  [JST04_1MM_RA]  132.84,104.9 0 top
J77  PTH  [1X04_NO_SILK]  145.54,129.03 180 top
J78  Qwiic RA  [JST04_1MM_RA]  132.84,125.22 180 top
J79  USB-to-Serial  [1X06_NO_SILK]  139.19,101.09 0 top
J80  [1X08_NO_SILK]  123.95,123.95 270 top
JP1  JUMPER-SMT_3_NO_SILK  [SMT-JUMPER_3_NO_SILK]  60.71,14.48 270 bottom
JP2  JUMPER-SMT_3_NO_SILK  [SMT-JUMPER_3_NO_SILK]  99.31,14.48 270 bottom
JP3  JUMPER-SMT_3_NO_SILK  [SMT-JUMPER_3_NO_SILK]  137.92,14.48 270 bottom
JP4  JUMPER-SMT_3_NO_SILK  [SMT-JUMPER_3_NO_SILK]  22.1,45.47 270 bottom
JP5  JUMPER-SMT_3_NO_SILK  [SMT-JUMPER_3_NO_SILK]  22.1,14.48 270 bottom
JP6  JUMPER-SMT_3_NO_SILK  [SMT-JUMPER_3_NO_SILK]  60.71,45.47 270 bottom
JP7  JUMPER-SMT_3_NO_SILK  [SMT-JUMPER_3_NO_SILK]  99.31,45.47 270 bottom
JP8  JUMPER-SMT_3_NO_SILK  [SMT-JUMPER_3_NO_SILK]  137.92,45.47 270 bottom
JP9  JUMPER-SMT_3_NO_SILK  [SMT-JUMPER_3_NO_SILK]  22.1,76.45 270 bottom
JP10  JUMPER-SMT_3_NO_SILK  [SMT-JUMPER_3_NO_SILK]  60.71,76.45 270 bottom
JP11  JUMPER-SMT_3_NO_SILK  [SMT-JUMPER_3_NO_SILK]  99.31,76.45 270 bottom
JP12  JUMPER-SMT_3_NO_SILK  [SMT-JUMPER_3_NO_SILK]  137.92,76.45 270 bottom
JP13  JUMPER-SMT_3_NO_SILK  [SMT-JUMPER_3_NO_SILK]  22.1,107.44 270 bottom
JP14  JUMPER-SMT_3_NO_SILK  [SMT-JUMPER_3_NO_SILK]  60.71,107.44 270 bottom
JP15  JUMPER-SMT_3_NO_SILK  [SMT-JUMPER_3_NO_SILK]  99.31,107.44 270 bottom
JP16  JUMPER-SMT_3_NO_SILK  [SMT-JUMPER_3_NO_SILK]  137.92,107.44 270 bottom
LED1  RED  [LED-0603]  65.79,29.72 0 top
LED2  RED  [LED-0603]  27.18,29.72 0 top
LED3  RED  [LED-0603]  104.39,29.72 0 top
LED4  RED  [LED-0603]  143,29.72 0 top
LED5  RED  [LED-0603]  27.18,60.71 0 top
LED6  RED  [LED-0603]  65.79,60.71 0 top
LED7  RED  [LED-0603]  104.39,60.71 0 top
LED8  RED  [LED-0603]  143,60.71 0 top
LED9  RED  [LED-0603]  27.18,91.69 0 top
LED10  RED  [LED-0603]  65.79,91.69 0 top
LED11  RED  [LED-0603]  104.39,91.69 0 top
LED12  RED  [LED-0603]  143,91.69 0 top
LED13  RED  [LED-0603]  27.18,122.68 0 top
LED14  RED  [LED-0603]  65.79,122.68 0 top
LED15  RED  [LED-0603]  104.39,122.68 0 top
LED16  RED  [LED-0603]  143,122.68 0 top
LOGO1  OSHW-LOGOMINI  [OSHW-LOGO-MINI]  13.21,8.64 0 bottom
LOGO2  SFE_LOGO_NAME_FLAME.1_INCH  [SFE_LOGO_NAME_FLAME_.1]  25.91,27.18 0 bottom
LOGO3  QWIIC_LOGO_5MM  [QWIIC_5MM]  12.45,9.65 90 top
LOGO4  SFE_LOGO_NAME.1_INCH  [SFE_LOGO_NAME_.1]  38.86,15.36 0 top
LOGO5  OSHW-LOGOMINI  [OSHW-LOGO-MINI]  51.82,8.64 0 bottom
LOGO6  SFE_LOGO_NAME_FLAME.1_INCH  [SFE_LOGO_NAME_FLAME_.1]  64.52,27.18 0 bottom
LOGO7  QWIIC_LOGO_5MM  [QWIIC_5MM]  51.05,9.65 90 top
LOGO8  SFE_LOGO_NAME.1_INCH  [SFE_LOGO_NAME_.1]  77.47,15.36 0 top
LOGO9  OSHW-LOGOMINI  [OSHW-LOGO-MINI]  90.42,8.64 0 bottom
LOGO10  SFE_LOGO_NAME_FLAME.1_INCH  [SFE_LOGO_NAME_FLAME_.1]  103.12,27.18 0 bottom
LOGO11  QWIIC_LOGO_5MM  [QWIIC_5MM]  89.66,9.65 90 top
LOGO12  SFE_LOGO_NAME.1_INCH  [SFE_LOGO_NAME_.1]  116.07,15.36 0 top
LOGO13  OSHW-LOGOMINI  [OSHW-LOGO-MINI]  129.03,8.64 0 bottom
LOGO14  SFE_LOGO_NAME_FLAME.1_INCH  [SFE_LOGO_NAME_FLAME_.1]  141.73,27.18 0 bottom
LOGO15  QWIIC_LOGO_5MM  [QWIIC_5MM]  128.27,9.65 90 top
LOGO16  SFE_LOGO_NAME.1_INCH  [SFE_LOGO_NAME_.1]  154.68,15.36 0 top
LOGO17  OSHW-LOGOMINI  [OSHW-LOGO-MINI]  13.21,39.62 0 bottom
LOGO18  SFE_LOGO_NAME_FLAME.1_INCH  [SFE_LOGO_NAME_FLAME_.1]  25.91,58.17 0 bottom
LOGO19  QWIIC_LOGO_5MM  [QWIIC_5MM]  12.45,40.64 90 top
LOGO20  SFE_LOGO_NAME.1_INCH  [SFE_LOGO_NAME_.1]  38.86,46.35 0 top
LOGO21  OSHW-LOGOMINI  [OSHW-LOGO-MINI]  51.82,39.62 0 bottom
LOGO22  SFE_LOGO_NAME_FLAME.1_INCH  [SFE_LOGO_NAME_FLAME_.1]  64.52,58.17 0 bottom
LOGO23  QWIIC_LOGO_5MM  [QWIIC_5MM]  51.05,40.64 90 top
LOGO24  SFE_LOGO_NAME.1_INCH  [SFE_LOGO_NAME_.1]  77.47,46.35 0 top
LOGO25  OSHW-LOGOMINI  [OSHW-LOGO-MINI]  90.42,39.62 0 bottom
LOGO26  SFE_LOGO_NAME_FLAME.1_INCH  [SFE_LOGO_NAME_FLAME_.1]  103.12,58.17 0 bottom
LOGO27  QWIIC_LOGO_5MM  [QWIIC_5MM]  89.66,40.64 90 top
LOGO28  SFE_LOGO_NAME.1_INCH  [SFE_LOGO_NAME_.1]  116.07,46.35 0 top
LOGO29  OSHW-LOGOMINI  [OSHW-LOGO-MINI]  129.03,39.62 0 bottom
LOGO30  SFE_LOGO_NAME_FLAME.1_INCH  [SFE_LOGO_NAME_FLAME_.1]  141.73,58.17 0 bottom
LOGO31  QWIIC_LOGO_5MM  [QWIIC_5MM]  128.27,40.64 90 top
LOGO32  SFE_LOGO_NAME.1_INCH  [SFE_LOGO_NAME_.1]  154.68,46.35 0 top
LOGO33  OSHW-LOGOMINI  [OSHW-LOGO-MINI]  13.21,70.61 0 bottom
LOGO34  SFE_LOGO_NAME_FLAME.1_INCH  [SFE_LOGO_NAME_FLAME_.1]  25.91,89.15 0 bottom
LOGO35  QWIIC_LOGO_5MM  [QWIIC_5MM]  12.45,71.63 90 top
LOGO36  SFE_LOGO_NAME.1_INCH  [SFE_LOGO_NAME_.1]  38.86,77.33 0 top
LOGO37  OSHW-LOGOMINI  [OSHW-LOGO-MINI]  51.82,70.61 0 bottom
LOGO38  SFE_LOGO_NAME_FLAME.1_INCH  [SFE_LOGO_NAME_FLAME_.1]  64.52,89.15 0 bottom
LOGO39  QWIIC_LOGO_5MM  [QWIIC_5MM]  51.05,71.63 90 top
LOGO40  SFE_LOGO_NAME.1_INCH  [SFE_LOGO_NAME_.1]  77.47,77.33 0 top
LOGO41  OSHW-LOGOMINI  [OSHW-LOGO-MINI]  90.42,70.61 0 bottom
LOGO42  SFE_LOGO_NAME_FLAME.1_INCH  [SFE_LOGO_NAME_FLAME_.1]  103.12,89.15 0 bottom
LOGO43  QWIIC_LOGO_5MM  [QWIIC_5MM]  89.66,71.63 90 top
LOGO44  SFE_LOGO_NAME.1_INCH  [SFE_LOGO_NAME_.1]  116.07,77.33 0 top
LOGO45  OSHW-LOGOMINI  [OSHW-LOGO-MINI]  129.03,70.61 0 bottom
LOGO46  SFE_LOGO_NAME_FLAME.1_INCH  [SFE_LOGO_NAME_FLAME_.1]  141.73,89.15 0 bottom
LOGO47  QWIIC_LOGO_5MM  [QWIIC_5MM]  128.27,71.63 90 top
LOGO48  SFE_LOGO_NAME.1_INCH  [SFE_LOGO_NAME_.1]  154.68,77.33 0 top
LOGO49  OSHW-LOGOMINI  [OSHW-LOGO-MINI]  13.21,101.6 0 bottom
LOGO50  SFE_LOGO_NAME_FLAME.1_INCH  [SFE_LOGO_NAME_FLAME_.1]  25.91,120.14 0 bottom
LOGO51  QWIIC_LOGO_5MM  [QWIIC_5MM]  12.45,102.62 90 top
LOGO52  SFE_LOGO_NAME.1_INCH  [SFE_LOGO_NAME_.1]  38.86,108.32 0 top
LOGO53  OSHW-LOGOMINI  [OSHW-LOGO-MINI]  51.82,101.6 0 bottom
LOGO54  SFE_LOGO_NAME_FLAME.1_INCH  [SFE_LOGO_NAME_FLAME_.1]  64.52,120.14 0 bottom
LOGO55  QWIIC_LOGO_5MM  [QWIIC_5MM]  51.05,102.62 90 top
LOGO56  SFE_LOGO_NAME.1_INCH  [SFE_LOGO_NAME_.1]  77.47,108.32 0 top
LOGO57  OSHW-LOGOMINI  [OSHW-LOGO-MINI]  90.42,101.6 0 bottom
LOGO58  SFE_LOGO_NAME_FLAME.1_INCH  [SFE_LOGO_NAME_FLAME_.1]  103.12,120.14 0 bottom
LOGO59  QWIIC_LOGO_5MM  [QWIIC_5MM]  89.66,102.62 90 top
LOGO60  SFE_LOGO_NAME.1_INCH  [SFE_LOGO_NAME_.1]  116.07,108.32 0 top
LOGO61  OSHW-LOGOMINI  [OSHW-LOGO-MINI]  129.03,101.6 0 bottom
LOGO62  SFE_LOGO_NAME_FLAME.1_INCH  [SFE_LOGO_NAME_FLAME_.1]  141.73,120.14 0 bottom
LOGO63  QWIIC_LOGO_5MM  [QWIIC_5MM]  128.27,102.62 90 top
LOGO64  SFE_LOGO_NAME.1_INCH  [SFE_LOGO_NAME_.1]  154.68,108.32 0 top
MEAS  JUMPER-COMBO_2_NC_TRACE  [COMBO-JUMPER_2_NC_TRACE]  33.53,11.94 90 bottom
MEAS1  JUMPER-COMBO_2_NC_TRACE  [COMBO-JUMPER_2_NC_TRACE]  72.14,11.94 90 bottom
MEAS2  JUMPER-COMBO_2_NC_TRACE  [COMBO-JUMPER_2_NC_TRACE]  110.74,11.94 90 bottom
MEAS3  JUMPER-COMBO_2_NC_TRACE  [COMBO-JUMPER_2_NC_TRACE]  149.35,11.94 90 bottom
MEAS4  JUMPER-COMBO_2_NC_TRACE  [COMBO-JUMPER_2_NC_TRACE]  33.53,42.93 90 bottom
MEAS5  JUMPER-COMBO_2_NC_TRACE  [COMBO-JUMPER_2_NC_TRACE]  72.14,42.93 90 bottom
MEAS6  JUMPER-COMBO_2_NC_TRACE  [COMBO-JUMPER_2_NC_TRACE]  110.74,42.93 90 bottom
MEAS7  JUMPER-COMBO_2_NC_TRACE  [COMBO-JUMPER_2_NC_TRACE]  149.35,42.93 90 bottom
MEAS8  JUMPER-COMBO_2_NC_TRACE  [COMBO-JUMPER_2_NC_TRACE]  33.53,73.91 90 bottom
MEAS9  JUMPER-COMBO_2_NC_TRACE  [COMBO-JUMPER_2_NC_TRACE]  72.14,73.91 90 bottom
MEAS10  JUMPER-COMBO_2_NC_TRACE  [COMBO-JUMPER_2_NC_TRACE]  110.74,73.91 90 bottom
MEAS11  JUMPER-COMBO_2_NC_TRACE  [COMBO-JUMPER_2_NC_TRACE]  149.35,73.91 90 bottom
MEAS12  JUMPER-COMBO_2_NC_TRACE  [COMBO-JUMPER_2_NC_TRACE]  33.53,104.9 90 bottom
MEAS13  JUMPER-COMBO_2_NC_TRACE  [COMBO-JUMPER_2_NC_TRACE]  72.14,104.9 90 bottom
MEAS14  JUMPER-COMBO_2_NC_TRACE  [COMBO-JUMPER_2_NC_TRACE]  110.74,104.9 90 bottom
MEAS15  JUMPER-COMBO_2_NC_TRACE  [COMBO-JUMPER_2_NC_TRACE]  149.35,104.9 90 bottom
PPS_LED  JUMPER-SMT_2_NC_TRACE_SILK  [SMT-JUMPER_2_NC_TRACE_SILK]  19.56,32.26 0 bottom
PPS_LED1  JUMPER-SMT_2_NC_TRACE_SILK  [SMT-JUMPER_2_NC_TRACE_SILK]  58.17,32.26 0 bottom
PPS_LED2  JUMPER-SMT_2_NC_TRACE_SILK  [SMT-JUMPER_2_NC_TRACE_SILK]  96.77,32.26 0 bottom
PPS_LED3  JUMPER-SMT_2_NC_TRACE_SILK  [SMT-JUMPER_2_NC_TRACE_SILK]  135.38,32.26 0 bottom
PPS_LED4  JUMPER-SMT_2_NC_TRACE_SILK  [SMT-JUMPER_2_NC_TRACE_SILK]  19.56,63.25 0 bottom
PPS_LED5  JUMPER-SMT_2_NC_TRACE_SILK  [SMT-JUMPER_2_NC_TRACE_SILK]  58.17,63.25 0 bottom
PPS_LED6  JUMPER-SMT_2_NC_TRACE_SILK  [SMT-JUMPER_2_NC_TRACE_SILK]  96.77,63.25 0 bottom
PPS_LED7  JUMPER-SMT_2_NC_TRACE_SILK  [SMT-JUMPER_2_NC_TRACE_SILK]  135.38,63.25 0 bottom
PPS_LED8  JUMPER-SMT_2_NC_TRACE_SILK  [SMT-JUMPER_2_NC_TRACE_SILK]  19.56,94.23 0 bottom
PPS_LED9  JUMPER-SMT_2_NC_TRACE_SILK  [SMT-JUMPER_2_NC_TRACE_SILK]  58.17,94.23 0 bottom
PPS_LED10  JUMPER-SMT_2_NC_TRACE_SILK  [SMT-JUMPER_2_NC_TRACE_SILK]  96.77,94.23 0 bottom
PPS_LED11  JUMPER-SMT_2_NC_TRACE_SILK  [SMT-JUMPER_2_NC_TRACE_SILK]  135.38,94.23 0 bottom
PPS_LED12  JUMPER-SMT_2_NC_TRACE_SILK  [SMT-JUMPER_2_NC_TRACE_SILK]  19.56,125.22 0 bottom
PPS_LED13  JUMPER-SMT_2_NC_TRACE_SILK  [SMT-JUMPER_2_NC_TRACE_SILK]  58.17,125.22 0 bottom
PPS_LED14  JUMPER-SMT_2_NC_TRACE_SILK  [SMT-JUMPER_2_NC_TRACE_SILK]  96.77,125.22 0 bottom
PPS_LED15  JUMPER-SMT_2_NC_TRACE_SILK  [SMT-JUMPER_2_NC_TRACE_SILK]  135.38,125.22 0 bottom
PWR  JUMPER-SMT_2_NC_TRACE_SILK  [SMT-JUMPER_2_NC_TRACE_SILK]  19.56,29.72 0 bottom
PWR1  JUMPER-SMT_2_NC_TRACE_SILK  [SMT-JUMPER_2_NC_TRACE_SILK]  58.17,29.72 0 bottom
PWR2  JUMPER-SMT_2_NC_TRACE_SILK  [SMT-JUMPER_2_NC_TRACE_SILK]  96.77,29.72 0 bottom
PWR3  JUMPER-SMT_2_NC_TRACE_SILK  [SMT-JUMPER_2_NC_TRACE_SILK]  135.38,29.72 0 bottom
PWR4  JUMPER-SMT_2_NC_TRACE_SILK  [SMT-JUMPER_2_NC_TRACE_SILK]  19.56,60.71 0 bottom
PWR5  JUMPER-SMT_2_NC_TRACE_SILK  [SMT-JUMPER_2_NC_TRACE_SILK]  58.17,60.71 0 bottom
PWR6  JUMPER-SMT_2_NC_TRACE_SILK  [SMT-JUMPER_2_NC_TRACE_SILK]  96.77,60.71 0 bottom
PWR7  JUMPER-SMT_2_NC_TRACE_SILK  [SMT-JUMPER_2_NC_TRACE_SILK]  135.38,60.71 0 bottom
PWR8  JUMPER-SMT_2_NC_TRACE_SILK  [SMT-JUMPER_2_NC_TRACE_SILK]  19.56,91.69 0 bottom
PWR9  JUMPER-SMT_2_NC_TRACE_SILK  [SMT-JUMPER_2_NC_TRACE_SILK]  58.17,91.69 0 bottom
PWR10  JUMPER-SMT_2_NC_TRACE_SILK  [SMT-JUMPER_2_NC_TRACE_SILK]  96.77,91.69 0 bottom
PWR11  JUMPER-SMT_2_NC_TRACE_SILK  [SMT-JUMPER_2_NC_TRACE_SILK]  135.38,91.69 0 bottom
PWR12  JUMPER-SMT_2_NC_TRACE_SILK  [SMT-JUMPER_2_NC_TRACE_SILK]  19.56,122.68 0 bottom
PWR13  JUMPER-SMT_2_NC_TRACE_SILK  [SMT-JUMPER_2_NC_TRACE_SILK]  58.17,122.68 0 bottom
PWR14  JUMPER-SMT_2_NC_TRACE_SILK  [SMT-JUMPER_2_NC_TRACE_SILK]  96.77,122.68 0 bottom
PWR15  JUMPER-SMT_2_NC_TRACE_SILK  [SMT-JUMPER_2_NC_TRACE_SILK]  135.38,122.68 0 bottom
R1  1k  [0603]  23.37,29.72 180 top
R2  33  [0603]  37.34,30.99 90 top
R3  33  [0603]  18.29,26.54 180 top
R4  33  [0603]  35.43,30.99 90 top
R5  3.3k  [0603]  13.21,22.73 0 top
R6  33  [0603]  18.29,24.64 180 top
R7  2.2k  [0603]  18.29,15.11 0 top
R8  2.2k  [0603]  18.29,17.02 0 top
R9  33  [0603]  56.9,26.54 180 top
R10  33  [0603]  56.9,24.64 180 top
R11  1k  [0603]  23.37,32.26 180 top
R12  2.2k  [0603]  56.9,15.11 0 top
R13  2.2k  [0603]  56.9,17.02 0 top
R14  33OHM-0402T-1/10W-1%  [0402-TIGHT]  32.26,22.1 180 top
R15  3.3k  [0603]  51.82,22.73 0 top
R16  1k  [0603]  61.98,32.26 180 top
R17  33  [0603]  75.95,30.99 90 top
R18  33  [0603]  18.29,20.83 180 top
R19  33  [0603]  18.29,18.92 180 top
R20  33  [0603]  33.53,30.99 90 top
R21  33  [0603]  18.29,22.61 180 top
R22  33  [0603]  74.04,30.99 90 top
R23  1k  [0603]  61.98,29.72 180 top
R24  33OHM-0402T-1/10W-1%  [0402-TIGHT]  70.87,22.1 180 top
R25  33  [0603]  56.9,20.83 180 top
R26  33  [0603]  56.9,18.92 180 top
R27  33  [0603]  72.14,30.99 90 top
R28  33  [0603]  56.9,22.61 180 top
R29  33  [0603]  95.5,26.54 180 top
R30  33  [0603]  95.5,24.64 180 top
R31  2.2k  [0603]  95.5,15.11 0 top
R32  2.2k  [0603]  95.5,17.02 0 top
R33  3.3k  [0603]  90.42,22.73 0 top
R34  1k  [0603]  100.58,32.26 180 top
R35  33  [0603]  114.55,30.99 90 top
R36  33  [0603]  112.65,30.99 90 top
R37  1k  [0603]  100.58,29.72 180 top
R38  33OHM-0402T-1/10W-1%  [0402-TIGHT]  109.47,22.1 180 top
R39  33  [0603]  95.5,20.83 180 top
R40  33  [0603]  95.5,18.92 180 top
R41  33  [0603]  110.74,30.99 90 top
R42  33  [0603]  95.5,22.61 180 top
R43  33  [0603]  134.11,26.54 180 top
R44  33  [0603]  134.11,24.64 180 top
R45  2.2k  [0603]  134.11,15.11 0 top
R46  2.2k  [0603]  134.11,17.02 0 top
R47  3.3k  [0603]  129.03,22.73 0 top
R48  1k  [0603]  139.19,32.26 180 top
R49  33  [0603]  153.16,30.99 90 top
R50  33  [0603]  151.26,30.99 90 top
R51  1k  [0603]  139.19,29.72 180 top
R52  33OHM-0402T-1/10W-1%  [0402-TIGHT]  148.08,22.1 180 top
R53  33  [0603]  134.11,20.83 180 top
R54  33  [0603]  134.11,18.92 180 top
R55  33  [0603]  149.35,30.99 90 top
R56  33  [0603]  134.11,22.61 180 top
R57  33  [0603]  18.29,57.53 180 top
R58  33  [0603]  18.29,55.63 180 top
R59  2.2k  [0603]  18.29,46.1 0 top
R60  2.2k  [0603]  18.29,48.01 0 top
R61  3.3k  [0603]  13.21,53.72 0 top
R62  1k  [0603]  23.37,63.25 180 top
R63  33  [0603]  37.34,61.98 90 top
R64  33  [0603]  35.43,61.98 90 top
R65  1k  [0603]  23.37,60.71 180 top
R66  33OHM-0402T-1/10W-1%  [0402-TIGHT]  32.26,53.09 180 top
R67  33  [0603]  18.29,51.82 180 top
R68  33  [0603]  18.29,49.91 180 top
R69  33  [0603]  33.53,61.98 90 top
R70  33  [0603]  18.29,53.59 180 top
R71  33  [0603]  56.9,57.53 180 top
R72  33  [0603]  56.9,55.63 180 top
R73  2.2k  [0603]  56.9,46.1 0 top
R74  2.2k  [0603]  56.9,48.01 0 top
R75  3.3k  [0603]  51.82,53.72 0 top
R76  1k  [0603]  61.98,63.25 180 top
R77  33  [0603]  75.95,61.98 90 top
R78  33  [0603]  74.04,61.98 90 top
R79  1k  [0603]  61.98,60.71 180 top
R80  33OHM-0402T-1/10W-1%  [0402-TIGHT]  70.87,53.09 180 top
R81  33  [0603]  56.9,51.82 180 top
R82  33  [0603]  56.9,49.91 180 top
R83  33  [0603]  72.14,61.98 90 top
R84  33  [0603]  56.9,53.59 180 top
R85  33  [0603]  95.5,57.53 180 top
R86  33  [0603]  95.5,55.63 180 top
R87  2.2k  [0603]  95.5,46.1 0 top
R88  2.2k  [0603]  95.5,48.01 0 top
R89  3.3k  [0603]  90.42,53.72 0 top
R90  1k  [0603]  100.58,63.25 180 top
R91  33  [0603]  114.55,61.98 90 top
R92  33  [0603]  112.65,61.98 90 top
R93  1k  [0603]  100.58,60.71 180 top
R94  33OHM-0402T-1/10W-1%  [0402-TIGHT]  109.47,53.09 180 top
R95  33  [0603]  95.5,51.82 180 top
R96  33  [0603]  95.5,49.91 180 top
R97  33  [0603]  110.74,61.98 90 top
R98  33  [0603]  95.5,53.59 180 top
R99  33  [0603]  134.11,57.53 180 top
R100  33  [0603]  134.11,55.63 180 top
R101  2.2k  [0603]  134.11,46.1 0 top
R102  2.2k  [0603]  134.11,48.01 0 top
R103  3.3k  [0603]  129.03,53.72 0 top
R104  1k  [0603]  139.19,63.25 180 top
R105  33  [0603]  153.16,61.98 90 top
R106  33  [0603]  151.26,61.98 90 top
R107  1k  [0603]  139.19,60.71 180 top
R108  33OHM-0402T-1/10W-1%  [0402-TIGHT]  148.08,53.09 180 top
R109  33  [0603]  134.11,51.82 180 top
R110  33  [0603]  134.11,49.91 180 top
R111  33  [0603]  149.35,61.98 90 top
R112  33  [0603]  134.11,53.59 180 top
R113  33  [0603]  18.29,88.52 180 top
R114  33  [0603]  18.29,86.61 180 top
R115  2.2k  [0603]  18.29,77.09 0 top
R116  2.2k  [0603]  18.29,78.99 0 top
R117  3.3k  [0603]  13.21,84.71 0 top
R118  1k  [0603]  23.37,94.23 180 top
R119  33  [0603]  37.34,92.96 90 top
R120  33  [0603]  35.43,92.96 90 top
R121  1k  [0603]  23.37,91.69 180 top
R122  33OHM-0402T-1/10W-1%  [0402-TIGHT]  32.26,84.07 180 top
R123  33  [0603]  18.29,82.8 180 top
R124  33  [0603]  18.29,80.9 180 top
R125  33  [0603]  33.53,92.96 90 top
R126  33  [0603]  18.29,84.58 180 top
R127  33  [0603]  56.9,88.52 180 top
R128  33  [0603]  56.9,86.61 180 top
R129  2.2k  [0603]  56.9,77.09 0 top
R130  2.2k  [0603]  56.9,78.99 0 top
R131  3.3k  [0603]  51.82,84.71 0 top
R132  1k  [0603]  61.98,94.23 180 top
R133  33  [0603]  75.95,92.96 90 top
R134  33  [0603]  74.04,92.96 90 top
R135  1k  [0603]  61.98,91.69 180 top
R136  33OHM-0402T-1/10W-1%  [0402-TIGHT]  70.87,84.07 180 top
R137  33  [0603]  56.9,82.8 180 top
R138  33  [0603]  56.9,80.9 180 top
R139  33  [0603]  72.14,92.96 90 top
R140  33  [0603]  56.9,84.58 180 top
R141  33  [0603]  95.5,88.52 180 top
R142  33  [0603]  95.5,86.61 180 top
R143  2.2k  [0603]  95.5,77.09 0 top
R144  2.2k  [0603]  95.5,78.99 0 top
R145  3.3k  [0603]  90.42,84.71 0 top
R146  1k  [0603]  100.58,94.23 180 top
R147  33  [0603]  114.55,92.96 90 top
R148  33  [0603]  112.65,92.96 90 top
R149  1k  [0603]  100.58,91.69 180 top
R150  33OHM-0402T-1/10W-1%  [0402-TIGHT]  109.47,84.07 180 top
R151  33  [0603]  95.5,82.8 180 top
R152  33  [0603]  95.5,80.9 180 top
R153  33  [0603]  110.74,92.96 90 top
R154  33  [0603]  95.5,84.58 180 top
R155  33  [0603]  134.11,88.52 180 top
R156  33  [0603]  134.11,86.61 180 top
R157  2.2k  [0603]  134.11,77.09 0 top
R158  2.2k  [0603]  134.11,78.99 0 top
R159  3.3k  [0603]  129.03,84.71 0 top
R160  1k  [0603]  139.19,94.23 180 top
R161  33  [0603]  153.16,92.96 90 top
R162  33  [0603]  151.26,92.96 90 top
R163  1k  [0603]  139.19,91.69 180 top
R164  33OHM-0402T-1/10W-1%  [0402-TIGHT]  148.08,84.07 180 top
R165  33  [0603]  134.11,82.8 180 top
R166  33  [0603]  134.11,80.9 180 top
R167  33  [0603]  149.35,92.96 90 top
R168  33  [0603]  134.11,84.58 180 top
R169  33  [0603]  18.29,119.51 180 top
R170  33  [0603]  18.29,117.6 180 top
R171  2.2k  [0603]  18.29,108.08 0 top
R172  2.2k  [0603]  18.29,109.98 0 top
R173  3.3k  [0603]  13.21,115.7 0 top
R174  1k  [0603]  23.37,125.22 180 top
R175  33  [0603]  37.34,123.95 90 top
R176  33  [0603]  35.43,123.95 90 top
R177  1k  [0603]  23.37,122.68 180 top
R178  33OHM-0402T-1/10W-1%  [0402-TIGHT]  32.26,115.06 180 top
R179  33  [0603]  18.29,113.79 180 top
R180  33  [0603]  18.29,111.89 180 top
R181  33  [0603]  33.53,123.95 90 top
R182  33  [0603]  18.29,115.57 180 top
R183  33  [0603]  56.9,119.51 180 top
R184  33  [0603]  56.9,117.6 180 top
R185  2.2k  [0603]  56.9,108.08 0 top
R186  2.2k  [0603]  56.9,109.98 0 top
R187  3.3k  [0603]  51.82,115.7 0 top
R188  1k  [0603]  61.98,125.22 180 top
R189  33  [0603]  75.95,123.95 90 top
R190  33  [0603]  74.04,123.95 90 top
R191  1k  [0603]  61.98,122.68 180 top
R192  33OHM-0402T-1/10W-1%  [0402-TIGHT]  70.87,115.06 180 top
R193  33  [0603]  56.9,113.79 180 top
R194  33  [0603]  56.9,111.89 180 top
R195  33  [0603]  72.14,123.95 90 top
R196  33  [0603]  56.9,115.57 180 top
R197  33  [0603]  95.5,119.51 180 top
R198  33  [0603]  95.5,117.6 180 top
R199  2.2k  [0603]  95.5,108.08 0 top
R200  2.2k  [0603]  95.5,109.98 0 top
R201  3.3k  [0603]  90.42,115.7 0 top
R202  1k  [0603]  100.58,125.22 180 top
R203  33  [0603]  114.55,123.95 90 top
R204  33  [0603]  112.65,123.95 90 top
R205  1k  [0603]  100.58,122.68 180 top
R206  33OHM-0402T-1/10W-1%  [0402-TIGHT]  109.47,115.06 180 top
R207  33  [0603]  95.5,113.79 180 top
R208  33  [0603]  95.5,111.89 180 top
R209  33  [0603]  110.74,123.95 90 top
R210  33  [0603]  95.5,115.57 180 top
R211  33  [0603]  134.11,119.51 180 top
R212  33  [0603]  134.11,117.6 180 top
R213  2.2k  [0603]  134.11,108.08 0 top
R214  2.2k  [0603]  134.11,109.98 0 top
R215  3.3k  [0603]  129.03,115.7 0 top
R216  1k  [0603]  139.19,125.22 180 top
R217  33  [0603]  153.16,123.95 90 top
R218  33  [0603]  151.26,123.95 90 top
R219  1k  [0603]  139.19,122.68 180 top
R220  33OHM-0402T-1/10W-1%  [0402-TIGHT]  148.08,115.06 180 top
R221  33  [0603]  134.11,113.79 180 top
R222  33  [0603]  134.11,111.89 180 top
R223  33  [0603]  149.35,123.95 90 top
R224  33  [0603]  134.11,115.57 180 top
U1  MAX-M10S  [MAX-M10S]  25.91,22.1 180 top
U2  MAX-M10S  [MAX-M10S]  64.52,22.1 180 top
U3  MAX-M10S  [MAX-M10S]  103.12,22.1 180 top
U4  MAX-M10S  [MAX-M10S]  141.73,22.1 180 top
U5  MAX-M10S  [MAX-M10S]  25.91,53.09 180 top
U6  MAX-M10S  [MAX-M10S]  64.52,53.09 180 top
U7  MAX-M10S  [MAX-M10S]  103.12,53.09 180 top
U8  MAX-M10S  [MAX-M10S]  141.73,53.09 180 top
U9  MAX-M10S  [MAX-M10S]  25.91,84.07 180 top
U10  MAX-M10S  [MAX-M10S]  64.52,84.07 180 top
U11  MAX-M10S  [MAX-M10S]  103.12,84.07 180 top
U12  MAX-M10S  [MAX-M10S]  141.73,84.07 180 top
U13  MAX-M10S  [MAX-M10S]  25.91,115.06 180 top
U14  MAX-M10S  [MAX-M10S]  64.52,115.06 180 top
U15  MAX-M10S  [MAX-M10S]  103.12,115.06 180 top
U16  MAX-M10S  [MAX-M10S]  141.73,115.06 180 top
U$1  [#3V3#4]  30.99,11.3 90 top
U$2  [#3V3#4]  69.6,11.3 90 top
U$3  [#GND#5]  36.07,11.3 90 top
U$4  [BLK0]  38.23,8.51 90 top
U$5  [GRN1]  21.34,8.64 90 top
U$6  [PPS7]  30.48,32.26 0 top
U$7  [PWR6]  30.73,29.72 0 top
U$8  [#RX#2]  28.45,10.79 90 top
U$9  [#TX#3]  25.91,10.92 90 top
U$10  [#3V3#4]  10.79,28.45 0 bottom
U$11  [#GND#5]  10.79,30.99 0 bottom
U$12  [##RST##2]  10.79,13.21 0 bottom
U$13  [##SAFE##0]  11.18,25.91 0 bottom
U$14  [#PPS#1]  10.67,18.29 0 bottom
U$15  [#RX#1]  10.29,20.83 0 bottom
U$16  [#TX#0]  10.41,23.37 0 bottom
U$17  [#GND#5]  74.68,11.3 90 top
U$18  [MAX#M10S1]  25.91,14.1 0 top
U$19  [#0]  9.91,28.45 0 top
U$20  [U#BLOX0]  25.91,15.75 0 top
U$21  [U#BLOX0]  25.91,24.64 0 bottom
U$22  [#TX#3]  25.91,10.92 90 bottom
U$23  [MAX#M10S1]  25.91,22.1 0 bottom
U$24  [SMA2]  25.91,19.56 0 bottom
U$25  [#RX#2]  28.45,10.79 90 bottom
U$26  [#3V3#4]  30.99,11.3 90 bottom
U$27  [#GND#5]  36.07,11.3 90 bottom
U$28  [BLK0]  38.23,8.51 90 bottom
U$29  [GRN1]  21.34,8.64 90 bottom
U$30  [#I�C#0]  22.1,12.06 0 bottom
U$31  [#3V3#4]  27.18,33.53 90 bottom
U$32  [#SCL#1]  22.1,33.53 90 bottom
U$33  [#SDA#0]  24.64,33.4 90 bottom
U$34  [#GND#5]  29.72,33.4 90 bottom
U$35  [#PPS#0]  16.64,32.26 0 bottom
U$36  [#PWR#0]  16.26,29.72 0 bottom
U$37  [#0]  10.79,25.02 0 top
U$38  [#1]  12.7,31.75 0 top
U$39  [##RST##0]  10.79,13.21 0 top
U$40  [#1]  9.78,31.12 90 top
U$41  [#MEAS#0]  33.53,16.38 90 bottom
U$42  [#EINT#0]  11.05,15.75 0 top
U$43  [#PPS#1]  10.67,18.29 0 top
U$44  [RX2]  10.29,20.83 0 top
U$45  [TX3]  10.16,23.37 0 top
U$46  [#EINT_#0]  10.92,15.75 0 bottom
U$47  [BLK0]  76.84,8.51 90 top
U$48  [GRN1]  59.94,8.64 90 top
U$49  [PPS7]  69.09,32.26 0 top
U$50  [PWR6]  69.34,29.72 0 top
U$51  [#RX#2]  67.06,10.79 90 top
U$52  [#TX#3]  64.52,10.92 90 top
U$53  [#3V3#4]  49.4,28.45 0 bottom
U$54  [#GND#5]  49.4,30.99 0 bottom
U$55  [##RST##2]  49.4,13.21 0 bottom
U$56  [##SAFE##0]  49.78,25.91 0 bottom
U$57  [#PPS#1]  49.28,18.29 0 bottom
U$58  [#RX#1]  48.89,20.83 0 bottom
U$59  [#TX#0]  49.02,23.37 0 bottom
U$60  [MAX#M10S1]  64.52,14.1 0 top
U$61  [U#BLOX0]  64.52,15.75 0 top
U$62  [U#BLOX0]  64.52,24.64 0 bottom
U$63  [MAX#M10S1]  64.52,22.1 0 bottom
U$64  [SMA2]  64.52,19.56 0 bottom
U$65  [#TX#3]  64.52,10.92 90 bottom
U$66  [#RX#2]  67.06,10.79 90 bottom
U$67  [#3V3#4]  69.6,11.3 90 bottom
U$68  [#GND#5]  74.68,11.3 90 bottom
U$69  [BLK0]  76.84,8.51 90 bottom
U$70  [GRN1]  59.94,8.64 90 bottom
U$71  [#I�C#0]  60.71,12.06 0 bottom
U$72  [#SCL#1]  60.71,33.53 90 bottom
U$73  [#SDA#0]  63.25,33.4 90 bottom
U$74  [#3V3#4]  65.79,33.53 90 bottom
U$75  [#GND#5]  68.33,33.4 90 bottom
U$76  [#PPS#0]  55.24,32.26 0 bottom
U$77  [#PWR#0]  54.86,29.72 0 bottom
U$78  [#0]  49.4,25.02 0 top
U$79  [#1]  51.31,31.75 0 top
U$80  [##RST##0]  49.4,13.21 0 top
U$81  [#EINT#0]  49.66,15.75 0 top
U$82  [#PPS#1]  49.28,18.29 0 top
U$83  [RX2]  48.89,20.83 0 top
U$84  [TX3]  48.77,23.37 0 top
U$85  [#0]  48.51,28.45 0 top
U$86  [#1]  48.39,31.12 90 top
U$87  [#MEAS#0]  72.14,16.38 90 bottom
U$88  [#EINT_#0]  49.53,15.75 0 bottom
U$89  [#3V3#4]  108.2,11.3 90 top
U$90  [#GND#5]  113.28,11.3 90 top
U$91  [BLK0]  115.44,8.51 90 top
U$92  [GRN1]  98.55,8.64 90 top
U$93  [PPS7]  107.7,32.26 0 top
U$94  [PWR6]  107.95,29.72 0 top
U$95  [#RX#2]  105.66,10.79 90 top
U$96  [#TX#3]  103.12,10.92 90 top
U$97  [#3V3#4]  88.01,28.45 0 bottom
U$98  [#GND#5]  88.01,30.99 0 bottom
U$99  [##RST##2]  88.01,13.21 0 bottom
U$100  [##SAFE##0]  88.39,25.91 0 bottom
U$101  [#PPS#1]  87.88,18.29 0 bottom
U$102  [#RX#1]  87.5,20.83 0 bottom
U$103  [#TX#0]  87.63,23.37 0 bottom
U$104  [MAX#M10S1]  103.12,14.1 0 top
U$105  [U#BLOX0]  103.12,15.75 0 top
U$106  [U#BLOX0]  103.12,24.64 0 bottom
U$107  [MAX#M10S1]  103.12,22.1 0 bottom
U$108  [SMA2]  103.12,19.56 0 bottom
U$109  [#TX#3]  103.12,10.92 90 bottom
U$110  [#RX#2]  105.66,10.79 90 bottom
U$111  [#3V3#4]  108.2,11.3 90 bottom
U$112  [#GND#5]  113.28,11.3 90 bottom
U$113  [BLK0]  115.44,8.51 90 bottom
U$114  [GRN1]  98.55,8.64 90 bottom
U$115  [#I�C#0]  99.31,12.06 0 bottom
U$116  [#SCL#1]  99.31,33.53 90 bottom
U$117  [#SDA#0]  101.85,33.4 90 bottom
U$118  [#3V3#4]  104.39,33.53 90 bottom
U$119  [#GND#5]  106.93,33.4 90 bottom
U$120  [#PPS#0]  93.85,32.26 0 bottom
U$121  [#PWR#0]  93.47,29.72 0 bottom
U$122  [#0]  88.01,25.02 0 top
U$123  [#1]  89.92,31.75 0 top
U$124  [##RST##0]  88.01,13.21 0 top
U$125  [#EINT#0]  88.27,15.75 0 top
U$126  [#PPS#1]  87.88,18.29 0 top
U$127  [RX2]  87.5,20.83 0 top
U$128  [TX3]  87.38,23.37 0 top
U$129  [#0]  87.12,28.45 0 top
U$130  [#1]  87,31.12 90 top
U$131  [#MEAS#0]  110.74,16.38 90 bottom
U$132  [#EINT_#0]  88.14,15.75 0 bottom
U$133  [#3V3#4]  146.81,11.3 90 top
U$134  [#GND#5]  151.89,11.3 90 top
U$135  [BLK0]  154.05,8.51 90 top
U$136  [GRN1]  137.16,8.64 90 top
U$137  [PPS7]  146.3,32.26 0 top
U$138  [PWR6]  146.56,29.72 0 top
U$139  [#RX#2]  144.27,10.79 90 top
U$140  [#TX#3]  141.73,10.92 90 top
U$141  [#3V3#4]  126.62,28.45 0 bottom
U$142  [#GND#5]  126.62,30.99 0 bottom
U$143  [##RST##2]  126.62,13.21 0 bottom
U$144  [##SAFE##0]  127,25.91 0 bottom
U$145  [#PPS#1]  126.49,18.29 0 bottom
U$146  [#RX#1]  126.11,20.83 0 bottom
U$147  [#TX#0]  126.24,23.37 0 bottom
U$148  [MAX#M10S1]  141.73,14.1 0 top
U$149  [U#BLOX0]  141.73,15.75 0 top
U$150  [U#BLOX0]  141.73,24.64 0 bottom
U$151  [MAX#M10S1]  141.73,22.1 0 bottom
U$152  [SMA2]  141.73,19.56 0 bottom
U$153  [#TX#3]  141.73,10.92 90 bottom
U$154  [#RX#2]  144.27,10.79 90 bottom
U$155  [#3V3#4]  146.81,11.3 90 bottom
U$156  [#GND#5]  151.89,11.3 90 bottom
U$157  [BLK0]  154.05,8.51 90 bottom
U$158  [GRN1]  137.16,8.64 90 bottom
U$159  [#I�C#0]  137.92,12.06 0 bottom
U$160  [#SCL#1]  137.92,33.53 90 bottom
U$161  [#SDA#0]  140.46,33.4 90 bottom
U$162  [#3V3#4]  143,33.53 90 bottom
U$163  [#GND#5]  145.54,33.4 90 bottom
U$164  [#PPS#0]  132.46,32.26 0 bottom
U$165  [#PWR#0]  132.08,29.72 0 bottom
U$166  [#0]  126.62,25.02 0 top
U$167  [#1]  128.52,31.75 0 top
U$168  [##RST##0]  126.62,13.21 0 top
U$169  [#EINT#0]  126.87,15.75 0 top
U$170  [#PPS#1]  126.49,18.29 0 top
U$171  [RX2]  126.11,20.83 0 top
U$172  [TX3]  125.98,23.37 0 top
U$173  [#0]  125.73,28.45 0 top
U$174  [#1]  125.6,31.12 90 top
U$175  [#MEAS#0]  149.35,16.38 90 bottom
U$176  [#EINT_#0]  126.75,15.75 0 bottom
U$177  [#3V3#4]  30.99,42.29 90 top
U$178  [#GND#5]  36.07,42.29 90 top
U$179  [BLK0]  38.23,39.5 90 top
U$180  [GRN1]  21.34,39.62 90 top
U$181  [PPS7]  30.48,63.25 0 top
U$182  [PWR6]  30.73,60.71 0 top
U$183  [#RX#2]  28.45,41.78 90 top
U$184  [#TX#3]  25.91,41.91 90 top
U$185  [#3V3#4]  10.79,59.44 0 bottom
U$186  [#GND#5]  10.79,61.98 0 bottom
U$187  [##RST##2]  10.79,44.2 0 bottom
U$188  [##SAFE##0]  11.18,56.9 0 bottom
U$189  [#PPS#1]  10.67,49.28 0 bottom
U$190  [#RX#1]  10.29,51.82 0 bottom
U$191  [#TX#0]  10.41,54.36 0 bottom
U$192  [MAX#M10S1]  25.91,45.08 0 top
U$193  [U#BLOX0]  25.91,46.74 0 top
U$194  [U#BLOX0]  25.91,55.63 0 bottom
U$195  [MAX#M10S1]  25.91,53.09 0 bottom
U$196  [SMA2]  25.91,50.55 0 bottom
U$197  [#TX#3]  25.91,41.91 90 bottom
U$198  [#RX#2]  28.45,41.78 90 bottom
U$199  [#3V3#4]  30.99,42.29 90 bottom
U$200  [#GND#5]  36.07,42.29 90 bottom
U$201  [BLK0]  38.23,39.5 90 bottom
U$202  [GRN1]  21.34,39.62 90 bottom
U$203  [#I�C#0]  22.1,43.05 0 bottom
U$204  [#SCL#1]  22.1,64.52 90 bottom
U$205  [#SDA#0]  24.64,64.39 90 bottom
U$206  [#3V3#4]  27.18,64.52 90 bottom
U$207  [#GND#5]  29.72,64.39 90 bottom
U$208  [#PPS#0]  16.64,63.25 0 bottom
U$209  [#PWR#0]  16.26,60.71 0 bottom
U$210  [#0]  10.79,56.01 0 top
U$211  [#1]  12.7,62.74 0 top
U$212  [##RST##0]  10.79,44.2 0 top
U$213  [#EINT#0]  11.05,46.74 0 top
U$214  [#PPS#1]  10.67,49.28 0 top
U$215  [RX2]  10.29,51.82 0 top
U$216  [TX3]  10.16,54.36 0 top
U$217  [#0]  9.91,59.44 0 top
U$218  [#1]  9.78,62.1 90 top
U$219  [#MEAS#0]  33.53,47.37 90 bottom
U$220  [#EINT_#0]  10.92,46.74 0 bottom
U$221  [#3V3#4]  69.6,42.29 90 top
U$222  [#GND#5]  74.68,42.29 90 top
U$223  [BLK0]  76.84,39.5 90 top
U$224  [GRN1]  59.94,39.62 90 top
U$225  [PPS7]  69.09,63.25 0 top
U$226  [PWR6]  69.34,60.71 0 top
U$227  [#RX#2]  67.06,41.78 90 top
U$228  [#TX#3]  64.52,41.91 90 top
U$229  [#3V3#4]  49.4,59.44 0 bottom
U$230  [#GND#5]  49.4,61.98 0 bottom
U$231  [##RST##2]  49.4,44.2 0 bottom
U$232  [##SAFE##0]  49.78,56.9 0 bottom
U$233  [#PPS#1]  49.28,49.28 0 bottom
U$234  [#RX#1]  48.89,51.82 0 bottom
U$235  [#TX#0]  49.02,54.36 0 bottom
U$236  [MAX#M10S1]  64.52,45.08 0 top
U$237  [U#BLOX0]  64.52,46.74 0 top
U$238  [U#BLOX0]  64.52,55.63 0 bottom
U$239  [MAX#M10S1]  64.52,53.09 0 bottom
U$240  [SMA2]  64.52,50.55 0 bottom
U$241  [#TX#3]  64.52,41.91 90 bottom
U$242  [#RX#2]  67.06,41.78 90 bottom
U$243  [#3V3#4]  69.6,42.29 90 bottom
U$244  [#GND#5]  74.68,42.29 90 bottom
U$245  [BLK0]  76.84,39.5 90 bottom
U$246  [GRN1]  59.94,39.62 90 bottom
U$247  [#I�C#0]  60.71,43.05 0 bottom
U$248  [#SCL#1]  60.71,64.52 90 bottom
U$249  [#SDA#0]  63.25,64.39 90 bottom
U$250  [#3V3#4]  65.79,64.52 90 bottom
U$251  [#GND#5]  68.33,64.39 90 bottom
U$252  [#PPS#0]  55.24,63.25 0 bottom
U$253  [#PWR#0]  54.86,60.71 0 bottom
U$254  [#0]  49.4,56.01 0 top
U$255  [#1]  51.31,62.74 0 top
U$256  [##RST##0]  49.4,44.2 0 top
U$257  [#EINT#0]  49.66,46.74 0 top
U$258  [#PPS#1]  49.28,49.28 0 top